# EAGLE board PowerSwitchingBoard (EAGLE 9.0.0), part 1 of 2
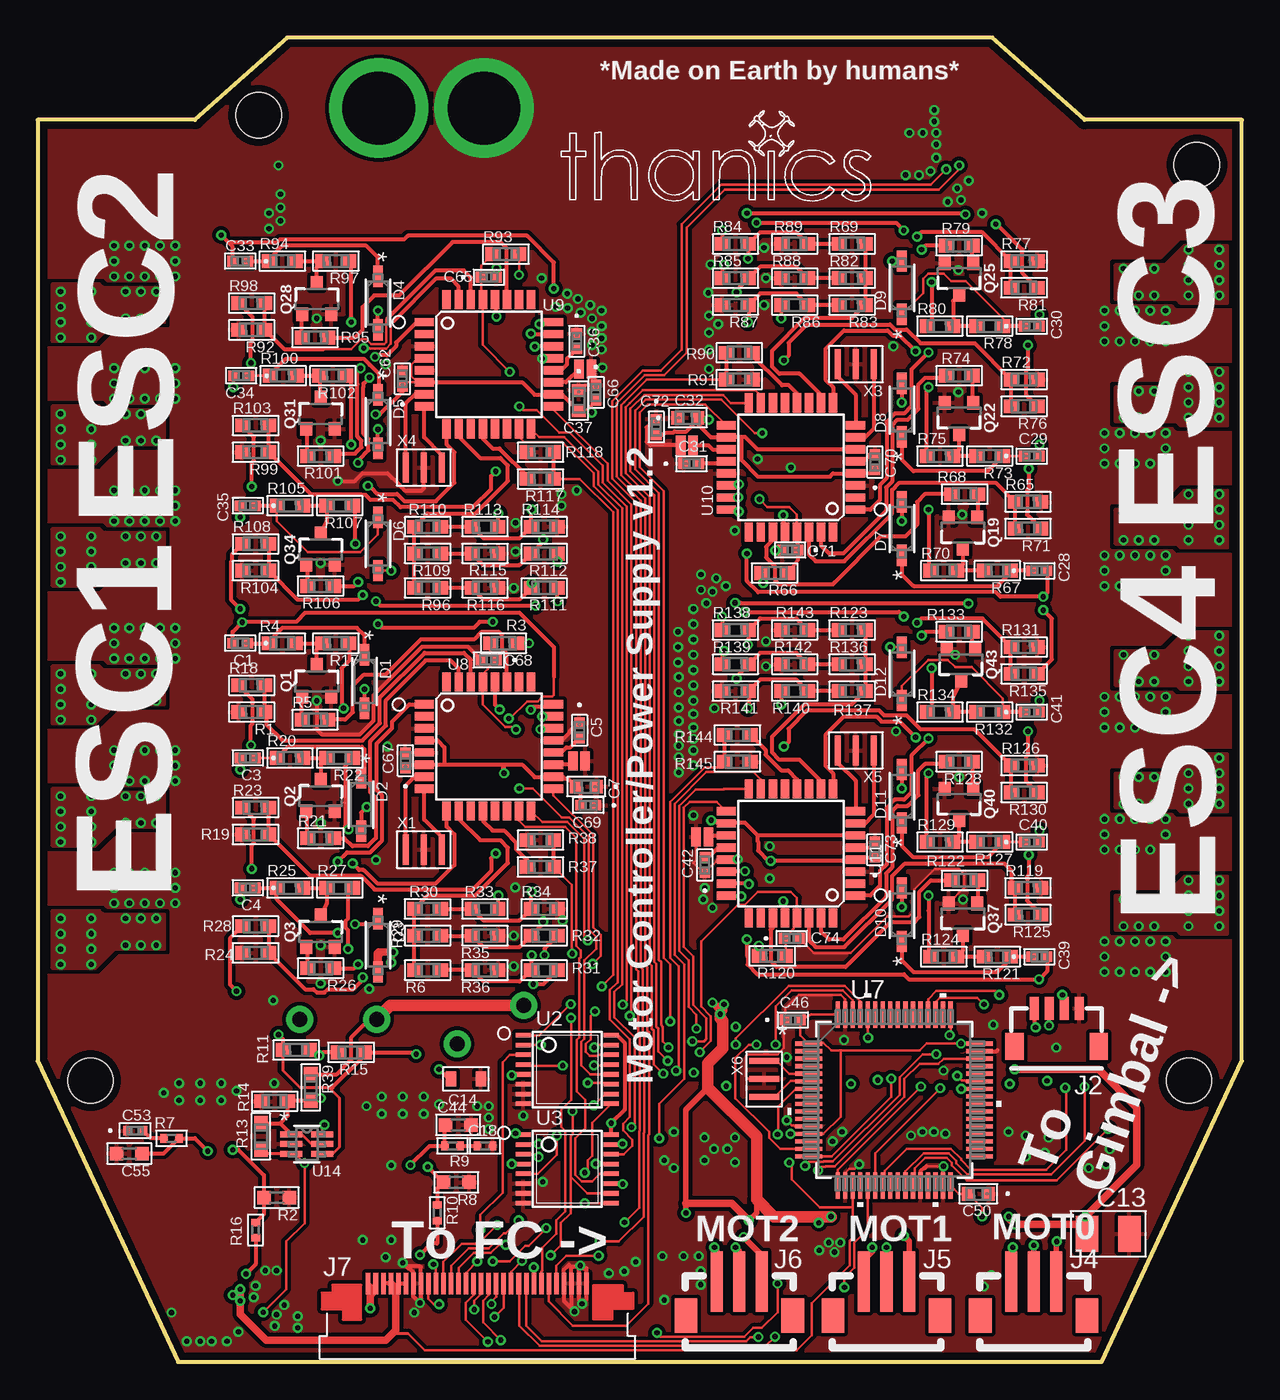
[diagram p0: board, top side]
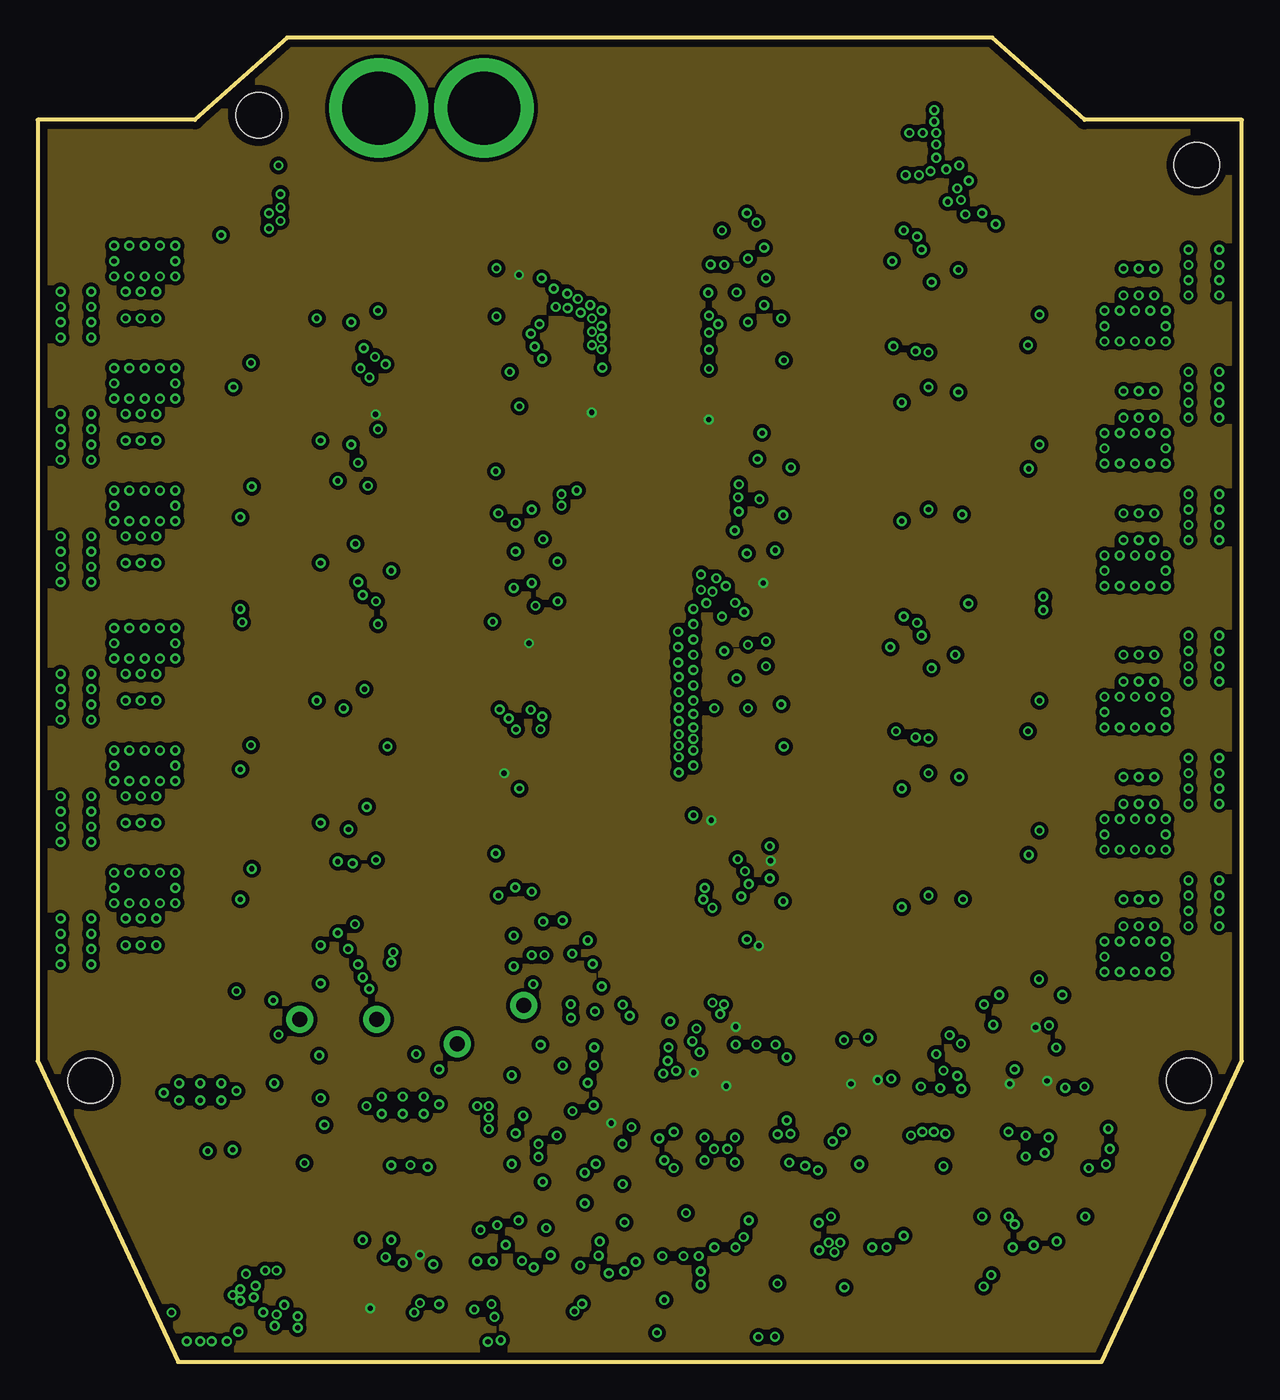
[diagram p1: board, inner layer Route2]
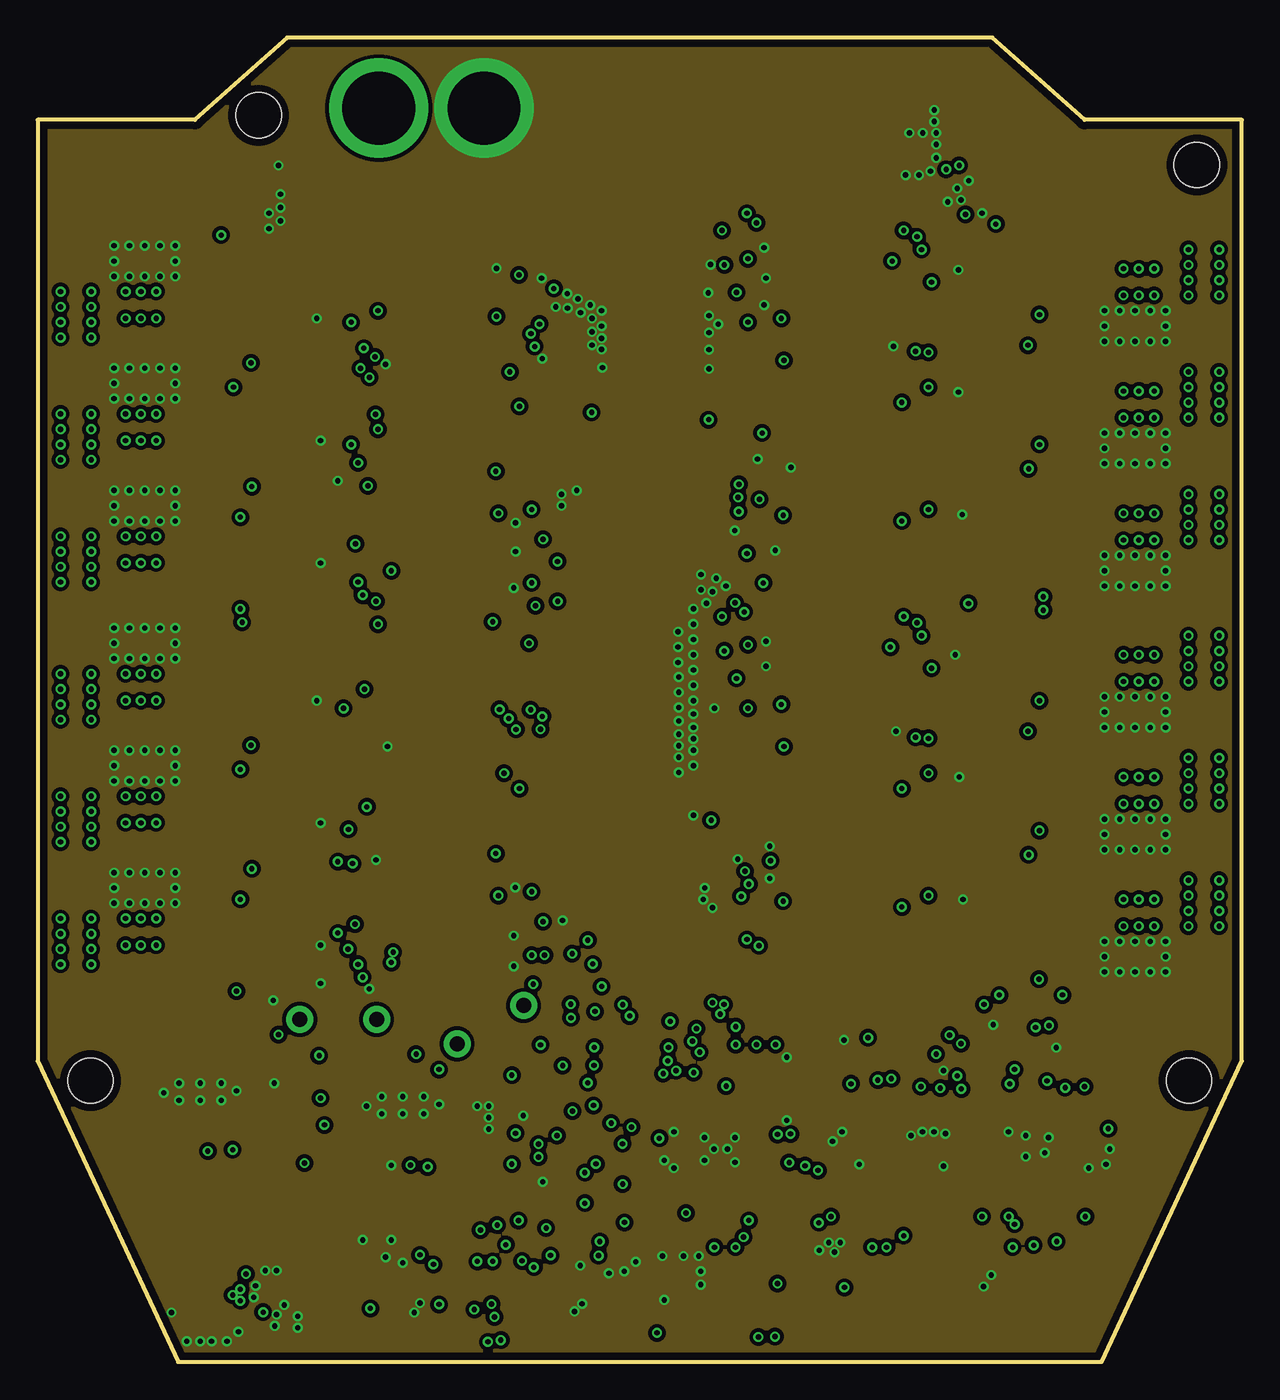
[diagram p2: board, inner layer Route15]
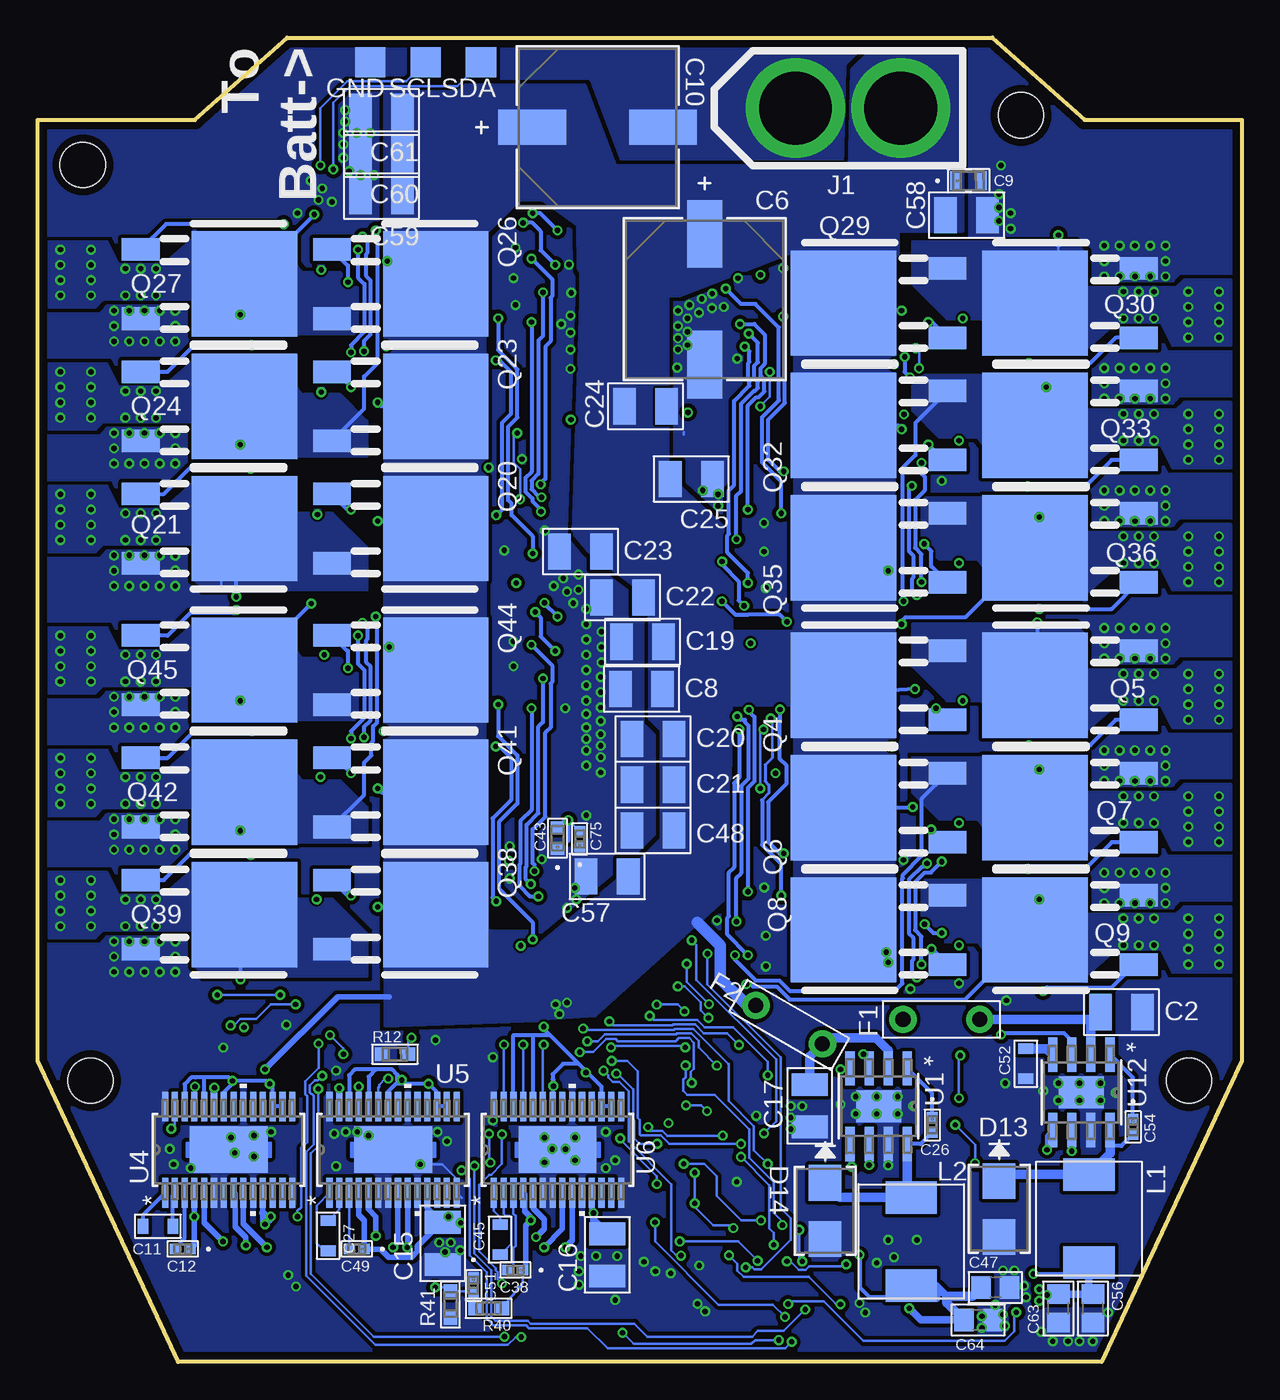
[diagram p3: board, bottom side, seen from below]

Size 80 x 88 mm. Coordinates in mm from the lower left corner, seen from the top.
Outline: 0,20 9.33,0 70.67,0 80,20 80,82.54 69.56,82.54 63.42,88 16.57,88 10.44,82.54 0,82.54 0,20
Copper layers (1*2*15*16): Top 0.035mm / dielectric 0.2mm / Route2 0.035mm / dielectric 1.2mm / Route15 0.035mm / dielectric 0.2mm / Bottom 0.035mm
Design rules "Elecrow_4-layer_PCB_eagle_rule": minimum track width 6mil, minimum drill 12mil, track to track 6mil, track to pad 6mil, pad to pad 6mil, via to via 8mil, smd to smd 0mil, copper to edge 20mil, drill to drill 10mil, minimum pad ring 6mil, minimum via ring 6mil, stop-mask expansion 0mil, vias tented up to drill 100mil, thermal gap 10mil
Holes 3 mm at 77,79.54 14.68,82.84 76.49,18.68 3.51,18.68

## Footprints (pad centres in the part's own frame; a part is rotated, then mirrored left to right if it is on the bottom)
0402-M = smd 0.711 x 0.711: 1 -0.508,0; 2 0.508,0
1210_CAPACITOR = smd 1.5 x 2.4: 1 -1.4,0; 2 1.4,0
PCAP_10X10-ELECT-M = smd 4.496 x 2.311: 1 -4.343,0; 2 4.343,0
G-188-M = smd 0.813 x 0.914: 1 -0.699,0; 2 0.699,0
G-21 = smd 0.711 x 1.245: 1 -0.851,0; 2 0.851,0
0603_CAPACITOR = smd 0.701 x 1.001: 1 -1.001,0; 2 1.001,0
C0402 = smd 0.5 x 0.6: 1 -0.5,0; 2 0.5,0
C0603 = smd 0.9 x 0.9: 1 -0.85,0; 2 0.85,0
C0805 = smd 1.3 x 1.5: 1 -0.95,0; 2 0.95,0
0402_CAPACITOR = smd 0.559 x 0.61: 1 -0.521,0; 2 0.521,0
SOD123-M = smd 1.416 x 0.652: A 1.776,0; C -1.776,0
DIODE_DO214AA_MBRS-M = smd 2.362 x 2.159: 1 -1.867,0; 2 1.867,0
0ZRB0400FF1A = drill 1 pad 1.8: 1 -2.55,0; 2 2.55,0
TP20SQ = smd 2 x 2: TP 0,0
XT60_CONNECTOR = drill 4.826 pad 6.604: + 3.5,0; - -3.5,0
JST_SH_4POS = smd 0.6 x 1.55: 1 -1.5,0; 2 -0.5,0; 3 0.5,0; 4 1.5,0 | smd 1.2 x 1.8: P$5 -2.8,2.525; P$6 2.8,2.525
B3B-ZR-SM4 = smd 0.8 x 4: 1 -1.5,0; 2 0,0; 3 1.5,0 | smd 1.5 x 2.3: P$4 3.55,2.25; P$5 -3.55,2.25
SFV30R-1STE1HLF = smd 0.3 x 1.4: 1 -7.25,0; 2 -6.75,0; 3 -6.25,0; 4 -5.75,0; 5 -5.25,0; 6 -4.75,0; 7 -4.25,0; 8 -3.75,0; 9 -3.25,0; 10 -2.75,0; 11 -2.25,0; 12 -1.75,0; 13 -1.25,0; 14 -0.75,0; 15 -0.25,0; 16 0.25,0; 17 0.75,0; 18 1.25,0; 19 1.75,0; 20 2.25,0; 21 2.75,0; 22 3.25,0; 23 3.75,0; 24 4.25,0; 25 4.75,0; 26 5.25,0; 27 5.75,0; 28 6.25,0; 29 6.75,0; 30 7.25,0
SMT-JUMPER_2_NO_NO-SILK = smd 0.635 x 1.27: 1 -0.406,0; 2 0.406,0
PA431.XXX = smd 2.15 x 3.4: P$1 -2.925,0; P$2 2.925,0
SOT23-3 = smd 0.8 x 0.9: 1 -0.95,-1; 2 0.95,-1; 3 0,1.1
DPAK = smd 1.5 x 2.5: 1 -2.3,0; 3 2.3,0 | smd 7 x 7: 2 0,6.9
RC0603N-M = smd 0.965 x 0.914: 1 -0.876,0; 2 0.876,0
R0603 = smd 0.9 x 0.9: 1 -0.85,0; 2 0.85,0
R0402 = smd 0.5 x 0.6: 1 -0.5,0; 2 0.5,0
D8-M = smd 2.286 x 0.61: 1 -2.515,1.905; 2 -2.515,0.635; 3 -2.515,-0.635; 4 -2.515,-1.905; 5 2.515,-1.905; 6 2.515,-0.635; 7 2.515,0.635; 8 2.515,1.905 | smd 2.13 x 3: EP 0,0
TSSOP16 = smd 0.305 x 0.991: 1 -2.275,-2.918; 2 -1.625,-2.918; 3 -0.975,-2.918; 4 -0.325,-2.918; 5 0.325,-2.918; 6 0.975,-2.918; 7 1.625,-2.918; 8 2.275,-2.918; 9 2.275,2.918; 10 1.625,2.918; 11 0.975,2.918; 12 0.325,2.918; 13 -0.325,2.918; 14 -0.975,2.918; 15 -1.625,2.918; 16 -2.275,2.918
PWP28_5P18X3P1-M = smd 1.981 x 0.406: 1 -2.87,4.225; 2 -2.87,3.575; 3 -2.87,2.925; 4 -2.87,2.275; 5 -2.87,1.625; 6 -2.87,0.975; 7 -2.87,0.325; 8 -2.87,-0.325; 9 -2.87,-0.975; 10 -2.87,-1.625; 11 -2.87,-2.275; 12 -2.87,-2.925; 13 -2.87,-3.575; 14 -2.87,-4.225; 15 2.87,-4.225; 16 2.87,-3.575; 17 2.87,-2.925; 18 2.87,-2.275; 19 2.87,-1.625; 20 2.87,-0.975; 21 2.87,-0.325; 22 2.87,0.325; 23 2.87,0.975; 24 2.87,1.625; 25 2.87,2.275; 26 2.87,2.925; 27 2.87,3.575; 28 2.87,4.225 | smd 3.1 x 5.18: 29 0,0
LQFP-64-M = smd 1.778 x 0.279: 1 -5.677,3.75; 2 -5.677,3.25; 3 -5.677,2.75; 4 -5.677,2.25; 5 -5.677,1.75; 6 -5.677,1.25; 7 -5.677,0.75; 8 -5.677,0.25; 9 -5.677,-0.25; 10 -5.677,-0.75; 11 -5.677,-1.25; 12 -5.677,-1.75; 13 -5.677,-2.25; 14 -5.677,-2.75; 15 -5.677,-3.25; 16 -5.677,-3.75; 33 5.677,-3.75; 34 5.677,-3.25; 35 5.677,-2.75; 36 5.677,-2.25; 37 5.677,-1.75; 38 5.677,-1.25; 39 5.677,-0.75; 40 5.677,-0.25; 41 5.677,0.25; 42 5.677,0.75; 43 5.677,1.25; 44 5.677,1.75; 45 5.677,2.25; 46 5.677,2.75; 47 5.677,3.25; 48 5.677,3.75 | smd 0.279 x 1.778: 17 -3.75,-5.677; 18 -3.25,-5.677; 19 -2.75,-5.677; 20 -2.25,-5.677; 21 -1.75,-5.677; 22 -1.25,-5.677; 23 -0.75,-5.677; 24 -0.25,-5.677; 25 0.25,-5.677; 26 0.75,-5.677; 27 1.25,-5.677; 28 1.75,-5.677; 29 2.25,-5.677; 30 2.75,-5.677; 31 3.25,-5.677; 32 3.75,-5.677; 49 3.75,5.677; 50 3.25,5.677; 51 2.75,5.677; 52 2.25,5.677; 53 1.75,5.677; 54 1.25,5.677; 55 0.75,5.677; 56 0.25,5.677; 57 -0.25,5.677; 58 -0.75,5.677; 59 -1.25,5.677; 60 -1.75,5.677; 61 -2.25,5.677; 62 -2.75,5.677; 63 -3.25,5.677; 64 -3.75,5.677
TQFP32-08 = smd 1.27 x 0.559: 1 -4.293,2.8; 2 -4.293,2; 3 -4.293,1.2; 4 -4.293,0.4; 5 -4.293,-0.4; 6 -4.293,-1.2; 7 -4.293,-2; 8 -4.293,-2.8; 17 4.293,-2.8; 18 4.293,-2; 19 4.293,-1.2; 20 4.293,-0.4; 21 4.293,0.4; 22 4.293,1.2; 23 4.293,2; 24 4.293,2.8 | smd 0.559 x 1.27: 9 -2.8,-4.293; 10 -2,-4.293; 11 -1.2,-4.293; 12 -0.4,-4.293; 13 0.4,-4.293; 14 1.2,-4.293; 15 2,-4.293; 16 2.8,-4.293; 25 2.8,4.293; 26 2,4.293; 27 1.2,4.293; 28 0.4,4.293; 29 -0.4,4.293; 30 -1.2,4.293; 31 -2,4.293; 32 -2.8,4.293
DCK6-M = smd 1.473 x 0.406: 1 -1.029,0.65; 2 -1.029,0; 3 -1.029,-0.65; 4 1.029,-0.65; 5 1.029,0; 6 1.029,0.65
3-SMD = smd 0.4 x 2: 1 1.2,0; 2 0,0; 3 -1.2,0

## Placement (x,y rotation side)
C1  0.1uF (50V)  [0402-M]  13.46,47.75 180 top
C2  22uF  [1210_CAPACITOR]  8,23.24 0 bottom
C3  0.1uF (50V)  [0402-M]  13.97,40.13 180 top
C4  0.1uF (50V)  [0402-M]  13.97,31.5 180 top
C5  0.1uF  [0402-M]  35.99,41.96 270 top
C6  470uF  [PCAP_10X10-ELECT-M]  35.69,70.61 270 bottom
C7  2.2uF  [G-188-M]  36.45,38.23 180 top
C8  22uF  [1210_CAPACITOR]  39.88,44.7 0 bottom
C9  10uF  [G-21]  18.16,78.49 0 bottom
C10  470uF  [PCAP_10X10-ELECT-M]  42.8,82.04 0 bottom
C11  10nF  [0603_CAPACITOR]  72.01,9.02 180 bottom
C12  0.1uF  [0402-M]  70.36,7.49 180 bottom
C13  22uF  [1210_CAPACITOR]  71.12,8.51 180 top
C14  10nF  [0603_CAPACITOR]  28.45,18.8 180 top
C15  22uF  [1210_CAPACITOR]  53.09,7.87 90 bottom
C16  22uF  [1210_CAPACITOR]  42.16,7.11 90 bottom
C17  22uF  [1210_CAPACITOR]  28.7,17.02 270 bottom
C18  1nF  [C0402]  29.72,14.35 0 top
C19  22uF  [1210_CAPACITOR]  39.83,47.85 0 bottom
C20  22uF  [1210_CAPACITOR]  39.12,41.4 0 bottom
C21  22uF  [1210_CAPACITOR]  39.12,38.35 0 bottom
C22  22uF  [1210_CAPACITOR]  41.15,50.8 0 bottom
C23  22uF  [1210_CAPACITOR]  43.94,53.85 0 bottom
C24  22uF  [1210_CAPACITOR]  39.62,63.5 180 bottom
C25  22uF  [1210_CAPACITOR]  36.58,58.67 180 bottom
C26  0.1uF  [0402-M]  20.57,15.75 270 bottom
C27  10nF  [0603_CAPACITOR]  60.71,8.38 270 bottom
C28  0.1uF (50V)  [0402-M]  66.55,52.58 0 top
C29  0.1uF (50V)  [0402-M]  66.04,60.2 0 top
C30  0.1uF (50V)  [0402-M]  66.04,68.83 0 top
C31  0.1uF  [0402-M]  43.43,59.69 0 top
C32  2.2uF  [G-188-M]  43.18,62.74 0 top
C33  0.1uF (50V)  [0402-M]  13.46,73.15 180 top
C34  0.1uF (50V)  [0402-M]  13.51,65.53 180 top
C35  0.1uF (50V)  [0402-M]  13.97,56.9 180 top
C36  0.1uF  [0402-M]  35.81,67.82 270 top
C37  2.2uF  [G-188-M]  35.94,63.88 270 top
C38  0.1uF  [0402-M]  48.26,6.1 180 bottom
C39  0.1uF (50V)  [0402-M]  66.55,26.92 0 top
C40  0.1uF (50V)  [0402-M]  66.04,34.54 0 top
C41  0.1uF (50V)  [0402-M]  66.04,43.18 0 top
C42  0.1uF  [0402-M]  44.32,33.02 90 top
C43  2.2uF  [G-188-M]  45.47,34.8 90 bottom
C44  43pF  [C0603]  27.94,15.75 0 top
C45  10nF  [0603_CAPACITOR]  49.28,8.13 90 bottom
C46  0.1uF  [0402-M]  50.16,22.73 0 top
C47  22uF  [C0805]  16.38,4.95 0 bottom
C48  22uF  [1210_CAPACITOR]  39.12,35.31 180 bottom
C49  0.1uF  [0402-M]  58.8,7.49 180 bottom
C50  2.2uF  [G-188-M]  62.48,11.18 180 top
C51  0.1uF  [0402-M]  51.05,5.08 270 bottom
C52  10nF  [0603_CAPACITOR]  14.35,19.81 90 bottom
C53  2.2nF  [0402_CAPACITOR]  6.48,15.37 0 top
C54  0.1uF  [0402-M]  7.24,15.62 270 bottom
C55  43pF  [C0603]  6.1,13.84 180 top
C56  22uF  [C0805]  9.91,3.56 270 bottom
C57  22uF  [1210_CAPACITOR]  42.16,32.26 180 bottom
C58  22uF  [1210_CAPACITOR]  18.29,76.2 0 bottom
C59  22uF  [1210_CAPACITOR]  57.15,77.47 180 bottom
C60  22uF  [1210_CAPACITOR]  57.15,80.26 180 bottom
C61  22uF  [1210_CAPACITOR]  57.15,83.06 180 bottom
C62  0.1uF  [0402-M]  24.23,65.33 90 top
C63  22uF  [C0805]  12.19,3.56 270 bottom
C64  22uF  [C0805]  17.53,2.79 0 bottom
C65  0.1uF  [0402-M]  29.97,72.09 0 top
C66  0.1uF  [0402-M]  37.08,64.41 270 top
C67  0.1uF  [0402-M]  24.43,39.95 90 top
C68  0.1uF  [0402-M]  29.97,46.63 180 top
C69  0.1uF  [0402-M]  36.58,36.98 180 top
C70  0.1uF  [0402-M]  55.63,59.79 90 top
C71  0.1uF  [0402-M]  49.99,53.95 180 top
C72  0.1uF  [0402-M]  41.1,62.13 270 top
C73  0.1uF  [0402-M]  55.63,34.04 90 top
C74  0.1uF  [0402-M]  50.09,28.14 0 top
C75  0.1uF  [0402-M]  43.99,34.75 90 bottom
D1  1N4148  [SOD123-M]  21.72,45.21 270 top
D2  1N4148  [SOD123-M]  21.49,37.03 270 top
D3  1N4148  [SOD123-M]  22.61,27.69 270 top
D4  1N4148  [SOD123-M]  22.61,70.36 270 top
D5  1N4148  [SOD123-M]  22.61,62.48 270 top
D6  1N4148  [SOD123-M]  22.61,54.36 270 top
D7  1N4148  [SOD123-M]  57.4,55.37 90 top
D8  1N4148  [SOD123-M]  57.4,63.25 90 top
D9  1N4148  [SOD123-M]  57.4,71.37 90 top
D10  1N4148  [SOD123-M]  57.4,29.72 90 top
D11  1N4148  [SOD123-M]  57.4,37.59 90 top
D12  1N4148  [SOD123-M]  57.4,45.72 90 top
D13  SSB44-E3/52T  [DIODE_DO214AA_MBRS-M]  16.13,10.16 270 bottom
D14  SSB44-E3/52T  [DIODE_DO214AA_MBRS-M]  27.69,10.03 270 bottom
F1  0ZRB0400FF1A  [0ZRB0400FF1A]  19.96,22.76 0 bottom
F2  0ZRB0400FF1A  [0ZRB0400FF1A]  30.07,22.4 330 bottom
GND  TPTP20SQ  [TP20SQ]  57.91,86.36 180 bottom
J1  ESC_CONTACTS  [XT60_CONNECTOR]  26.16,83.31 0 bottom
J2  [JST_SH_4POS]  67.69,23.5 180 top
J4  B3B-ZR-SM4  [B3B-ZR-SM4]  66.17,5.33 180 top
J5  B3B-ZR-SM4  [B3B-ZR-SM4]  56.39,5.33 180 top
J6  B3B-ZR-SM4  [B3B-ZR-SM4]  46.61,5.33 180 top
J7  SFV30R-1STE1HLF  [SFV30R-1STE1HLF]  29.21,5.21 0 top
JP1  JUMPER-SMT_2_NO_NO-SILK  [SMT-JUMPER_2_NO_NO-SILK]  35.97,39.93 0 top
JP3  JUMPER-SMT_2_NO_NO-SILK  [SMT-JUMPER_2_NO_NO-SILK]  43.13,60.91 180 top
JP4  JUMPER-SMT_2_NO_NO-SILK  [SMT-JUMPER_2_NO_NO-SILK]  36.37,65.96 0 top
JP5  JUMPER-SMT_2_NO_NO-SILK  [SMT-JUMPER_2_NO_NO-SILK]  44.15,34.87 180 top
L1  10uH  [PA431.XXX]  10.16,9.53 270 bottom
L2  10uH  [PA431.XXX]  21.97,8 270 bottom
Q1  500mA/300V  [SOT23-3]  18.54,45.21 0 top
Q2  500mA/300V  [SOT23-3]  18.8,37.59 0 top
Q3  500mA/300V  [SOT23-3]  18.8,28.57 0 top
Q4  IRLR8726  [DPAK]  19.56,44.96 90 bottom
Q5  IRLR8726  [DPAK]  6.86,44.96 90 bottom
Q6  IRLR8726  [DPAK]  19.56,36.83 90 bottom
Q7  IRLR8726  [DPAK]  6.86,36.83 90 bottom
Q8  IRLR8726  [DPAK]  19.56,28.7 90 bottom
Q9  IRLR8726  [DPAK]  6.86,28.7 90 bottom
Q19  500mA/300V  [SOT23-3]  61.47,55.12 180 top
Q20  IRLR8726  [DPAK]  60.45,55.37 270 bottom
Q21  IRLR8726  [DPAK]  73.15,55.37 270 bottom
Q22  500mA/300V  [SOT23-3]  61.21,62.74 180 top
Q23  IRLR8726  [DPAK]  60.45,63.5 270 bottom
Q24  IRLR8726  [DPAK]  73.15,63.5 270 bottom
Q25  500mA/300V  [SOT23-3]  61.21,72.01 180 top
Q26  IRLR8726  [DPAK]  60.45,71.63 270 bottom
Q27  IRLR8726  [DPAK]  73.15,71.63 270 bottom
Q28  500mA/300V  [SOT23-3]  18.54,70.61 0 top
Q29  IRLR8726  [DPAK]  19.56,70.36 90 bottom
Q30  IRLR8726  [DPAK]  6.86,70.36 90 bottom
Q31  500mA/300V  [SOT23-3]  18.8,62.99 0 top
Q32  IRLR8726  [DPAK]  19.56,62.23 90 bottom
Q33  IRLR8726  [DPAK]  6.86,62.23 90 bottom
Q34  500mA/300V  [SOT23-3]  18.8,53.98 0 top
Q35  IRLR8726  [DPAK]  19.56,54.1 90 bottom
Q36  IRLR8726  [DPAK]  6.86,54.1 90 bottom
Q37  500mA/300V  [SOT23-3]  61.47,29.46 180 top
Q38  IRLR8726  [DPAK]  60.45,29.72 270 bottom
Q39  IRLR8726  [DPAK]  73.15,29.72 270 bottom
Q40  500mA/300V  [SOT23-3]  61.21,37.08 180 top
Q41  IRLR8726  [DPAK]  60.45,37.85 270 bottom
Q42  IRLR8726  [DPAK]  73.15,37.85 270 bottom
Q43  500mA/300V  [SOT23-3]  61.34,46.35 180 top
Q44  IRLR8726  [DPAK]  60.45,45.97 270 bottom
Q45  IRLR8726  [DPAK]  73.15,45.97 270 bottom
R1  10k  [RC0603N-M]  14.22,43.18 180 top
R2  3.24k  [R0603]  15.88,10.92 180 top
R3  10k  [RC0603N-M]  30.95,47.75 0 top
R4  2.2k  [RC0603N-M]  16.26,47.75 0 top
R5  4.7k  [RC0603N-M]  18.43,42.67 0 top
R6  47k  [RC0603N-M]  25.91,26.04 180 top
R7  28.7k  [R0402]  8.89,14.86 0 top
R8  1.96k  [R0603]  27.81,11.94 180 top
R9  39.2k  [R0402]  27.56,14.35 180 top
R10  10.2k  [R0402]  26.54,9.91 270 top
R11  100k  [RC0603N-M]  17.17,20.73 180 top
R12  10k  [RC0603N-M]  56.26,20.45 0 bottom
R13  100k  [RC0603N-M]  14.83,14.99 270 top
R14  1k  [RC0603N-M]  15.75,17.32 180 top
R15  100k  [RC0603N-M]  20.83,20.57 180 top
R16  10.2k  [R0402]  14.48,8.76 270 top
R17  100R  [RC0603N-M]  19.81,47.75 180 top
R18  100R  [RC0603N-M]  14.22,44.96 0 top
R19  10k  [RC0603N-M]  14.48,35.05 180 top
R20  2.2k  [RC0603N-M]  16.76,40.13 0 top
R21  4.7k  [RC0603N-M]  18.8,34.8 0 top
R22  100R  [RC0603N-M]  20.07,40.13 180 top
R23  100R  [RC0603N-M]  14.48,36.83 0 top
R24  10k  [RC0603N-M]  14.48,27.18 180 top
R25  2.2k  [RC0603N-M]  16.76,31.5 0 top
R26  4.7k  [RC0603N-M]  18.8,26.16 0 top
R27  100R  [RC0603N-M]  20.07,31.5 180 top
R28  100R  [RC0603N-M]  14.48,28.96 0 top
R29  47k  [RC0603N-M]  25.91,28.32 180 top
R30  47k  [RC0603N-M]  25.91,30.1 180 top
R31  47k  [RC0603N-M]  33.66,26.04 180 top
R32  47k  [RC0603N-M]  33.66,28.32 180 top
R33  47k  [RC0603N-M]  29.72,30.1 180 top
R34  4.7k  [RC0603N-M]  33.66,30.1 0 top
R35  4.7k  [RC0603N-M]  29.72,28.32 0 top
R36  4.7k  [RC0603N-M]  29.72,26.04 0 top
R37  10k  [RC0603N-M]  33.4,32.89 180 top
R38  10k  [RC0603N-M]  33.4,34.67 180 top
R39  2.2k  [RC0603N-M]  18.14,18.24 270 top
R40  10k  [RC0603N-M]  50.04,3.56 180 bottom
R41  1.5k  [RC0603N-M]  52.58,3.81 270 bottom
R65  10k  [RC0603N-M]  65.79,57.15 0 top
R66  10k  [RC0603N-M]  48.96,52.43 180 top
R67  2.2k  [RC0603N-M]  63.75,52.58 180 top
R68  4.7k  [RC0603N-M]  61.58,57.66 180 top
R69  47k  [RC0603N-M]  54.1,74.3 0 top
R70  100R  [RC0603N-M]  60.2,52.58 0 top
R71  100R  [RC0603N-M]  65.79,55.37 180 top
R72  10k  [RC0603N-M]  65.53,65.28 0 top
R73  2.2k  [RC0603N-M]  63.25,60.2 180 top
R74  4.7k  [RC0603N-M]  61.21,65.53 180 top
R75  100R  [RC0603N-M]  59.94,60.2 0 top
R76  100R  [RC0603N-M]  65.53,63.5 180 top
R77  10k  [RC0603N-M]  65.53,73.15 0 top
R78  2.2k  [RC0603N-M]  63.25,68.83 180 top
R79  4.7k  [RC0603N-M]  61.21,74.17 180 top
R80  100R  [RC0603N-M]  59.94,68.83 0 top
R81  100R  [RC0603N-M]  65.53,71.37 180 top
R82  47k  [RC0603N-M]  54.1,72.01 0 top
R83  47k  [RC0603N-M]  54.1,70.23 0 top
R84  47k  [RC0603N-M]  46.35,74.3 0 top
R85  47k  [RC0603N-M]  46.35,72.01 0 top
R86  47k  [RC0603N-M]  50.29,70.23 0 top
R87  4.7k  [RC0603N-M]  46.35,70.23 180 top
R88  4.7k  [RC0603N-M]  50.29,72.01 180 top
R89  4.7k  [RC0603N-M]  50.29,74.3 180 top
R90  10k  [RC0603N-M]  46.61,67.06 0 top
R91  10k  [RC0603N-M]  46.61,65.28 0 top
R92  10k  [RC0603N-M]  14.22,68.58 180 top
R93  10k  [RC0603N-M]  31.1,73.61 0 top
R94  2.2k  [RC0603N-M]  16.26,73.15 0 top
R95  4.7k  [RC0603N-M]  18.43,68.07 0 top
R96  47k  [RC0603N-M]  25.91,51.44 180 top
R97  100R  [RC0603N-M]  19.81,73.15 180 top
R98  100R  [RC0603N-M]  14.22,70.36 0 top
R99  10k  [RC0603N-M]  14.48,60.45 180 top
R100  2.2k  [RC0603N-M]  16.31,65.53 0 top
R101  4.7k  [RC0603N-M]  18.8,60.2 0 top
R102  100R  [RC0603N-M]  19.61,65.53 180 top
R103  100R  [RC0603N-M]  14.48,62.23 0 top
R104  10k  [RC0603N-M]  14.48,52.58 180 top
R105  2.2k  [RC0603N-M]  16.76,56.9 0 top
R106  4.7k  [RC0603N-M]  18.8,51.56 0 top
R107  100R  [RC0603N-M]  20.07,56.9 180 top
R108  100R  [RC0603N-M]  14.48,54.36 0 top
R109  47k  [RC0603N-M]  25.91,53.72 180 top
R110  47k  [RC0603N-M]  25.91,55.5 180 top
R111  47k  [RC0603N-M]  33.66,51.44 180 top
R112  47k  [RC0603N-M]  33.66,53.72 180 top
R113  47k  [RC0603N-M]  29.72,55.5 180 top
R114  4.7k  [RC0603N-M]  33.66,55.5 0 top
R115  4.7k  [RC0603N-M]  29.72,53.72 0 top
R116  4.7k  [RC0603N-M]  29.72,51.44 0 top
R117  10k  [RC0603N-M]  33.4,58.67 180 top
R118  10k  [RC0603N-M]  33.4,60.45 180 top
R119  10k  [RC0603N-M]  65.79,31.5 0 top
R120  10k  [RC0603N-M]  48.81,26.97 180 top
R121  2.2k  [RC0603N-M]  63.75,26.92 180 top
R122  4.7k  [RC0603N-M]  61.58,32 180 top
R123  47k  [RC0603N-M]  54.1,48.64 0 top
R124  100R  [RC0603N-M]  60.2,26.92 0 top
R125  100R  [RC0603N-M]  65.79,29.72 180 top
R126  10k  [RC0603N-M]  65.53,39.62 0 top
R127  2.2k  [RC0603N-M]  63.25,34.54 180 top
R128  4.7k  [RC0603N-M]  61.21,39.88 180 top
R129  100R  [RC0603N-M]  59.94,34.54 0 top
R130  100R  [RC0603N-M]  65.53,37.85 180 top
R131  10k  [RC0603N-M]  65.53,47.5 0 top
R132  2.2k  [RC0603N-M]  63.25,43.18 180 top
R133  4.7k  [RC0603N-M]  61.21,48.51 180 top
R134  100R  [RC0603N-M]  59.94,43.18 0 top
R135  100R  [RC0603N-M]  65.53,45.72 180 top
R136  47k  [RC0603N-M]  54.1,46.35 0 top
R137  47k  [RC0603N-M]  54.1,44.58 0 top
R138  47k  [RC0603N-M]  46.35,48.64 0 top
R139  47k  [RC0603N-M]  46.35,46.35 0 top
R140  47k  [RC0603N-M]  50.29,44.58 0 top
R141  4.7k  [RC0603N-M]  46.35,44.58 180 top
R142  4.7k  [RC0603N-M]  50.29,46.35 180 top
R143  4.7k  [RC0603N-M]  50.29,48.64 180 top
R144  10k  [RC0603N-M]  46.48,41.66 0 top
R145  10k  [RC0603N-M]  46.48,39.88 0 top
SCL  TPTP20SQ  [TP20SQ]  54.23,86.36 180 bottom
SDA  TPTP20SQ  [TP20SQ]  50.55,86.36 180 bottom
U1  TPS54331DRD8-M  [D8-M]  24.13,16.99 270 bottom
U2  74HC4052PW  [TSSOP16]  35.18,19.43 270 top
U3  74HC4052PW  [TSSOP16]  35.18,12.83 270 top
U4  DRV8313  [PWP28_5P18X3P1-M]  67.31,14.1 90 bottom
U5  DRV8313  [PWP28_5P18X3P1-M]  56.39,14.1 90 bottom
U6  DRV8313  [PWP28_5P18X3P1-M]  45.47,14.1 90 bottom
U7  STM32F103RCT6LQFP-64-M  [LQFP-64-M]  56.9,17.4 0 top
U8  MEGA8-AI  [TQFP32-08]  29.97,40.89 0 top
U9  MEGA8-AI  [TQFP32-08]  29.97,66.29 0 top
U10  MEGA8-AI  [TQFP32-08]  50.04,59.44 180 top
U11  MEGA8-AI  [TQFP32-08]  50.04,33.78 180 top
U12  TPS54331DRD8-M  [D8-M]  10.67,17.91 270 bottom
U14  SN74LVC1G373DCKRDCK6-M  [DCK6-M]  17.88,14.48 0 top
X1  16MHz  [3-SMD]  25.65,34.04 0 top
X3  16MHz  [3-SMD]  54.36,66.29 180 top
X4  16MHz  [3-SMD]  25.65,59.44 0 top
X5  16MHz  [3-SMD]  54.36,40.64 180 top
X6  8MHz  [3-SMD]  48.26,18.8 270 top

## Library data of the parts
C1 C3-C5 C12 C26 C28-C31 C33-C36 C38-C42 C46 C49 C51 C54 C62 C65-C75 = 0.1uF-capacitor-0402; MANUFACTURER_PART_NUMBER: 0402ZD104KAT2A; VENDOR: AVX Corporation
C2 C8 C11 C13-C17 C19-C25 C27 C45 C48 C52 C53 C57-C61 J1 J2 L1 L2 Q4-Q9 Q20 Q21 Q23 Q24 Q26 Q27 Q29 Q30 Q32 Q33 Q35 Q36 Q38 Q39 Q41 Q42 Q44 Q45 U2 U3 X1 X3-X6 = thanics_robotics
C6 C10 = 470uF-capacitor; MANUFACTURER_PART_NUMBER: UWT1E471MNL1GS; VENDOR: Nichicon
C7 C32 C37 C43 C50 = 2.2uF X5R Capacitor; COPYRIGHT: Copyright C 2015 Accelerated Designs. All rights reserved; MANUFACTURER_PART_NUMBER: GRM188R61C225KE15J; VENDOR: Vendor
C9 = 10uF X5R Ceramic Capacitor; COPYRIGHT: Copyright C 2015 Accelerated Designs. All rights reserved; MANUFACTURER_PART_NUMBER: GRM21BR60J106ME19L; VENDOR: Vendor
C18 = thanics-capacitor; RATING: 6.3V
C44 C55 = thanics-capacitor; RATING: 50V
C47 C56 C63 C64 = thanics-capacitor; RATING: 16V
D1-D12 = 1n4148w-diode; COPYRIGHT: Copyright C 2015 Accelerated Designs. All rights reserved; MANUFACTURER_PART_NUMBER: 1N4148W7F; VENDOR: Diodes Inc
D13 D14 = ssb44-schottky; MANUFACTURER_PART_NUMBER: SSB44E352T; VENDOR: Vishay
F1 F2 = ptc-fuse
GND SCL SDA = testpad
J4-J6 = jst
J7 = thanics-connector
JP1 JP3-JP5 = SparkFun-Jumpers
Q1-Q3 Q19 Q22 Q25 Q28 Q31 Q34 Q37 Q40 Q43 = SparkFun-DiscreteSemi; PROD_ID: TRANS-09116
R1 R3 R12 R19 R24 R37 R38 R40 R65 R66 R72 R77 R90-R93 R99 R104 R117-R120 R126 R131 R144 R145 = 10k-resistor(0603); MANUFACTURER_PART_NUMBER: RC0603JR0710KL; VENDOR: Yageo
R2 R7-R10 R16 = thanics-resistor
R4 R20 R25 R39 R67 R73 R78 R94 R100 R105 R121 R127 R132 = 2.2k-resistor; MANUFACTURER_PART_NUMBER: RC0603JR072K2L; VENDOR: Yageo
R5 R21 R26 R34-R36 R68 R74 R79 R87-R89 R95 R101 R106 R114-R116 R122 R128 R133 R141-R143 = 4.7k-resistor; MANUFACTURER_PART_NUMBER: RC0603JR074K7L; VENDOR: Yageo
R6 R29-R33 R69 R82-R86 R96 R109-R113 R123 R136-R140 = 47k-resistor; MANUFACTURER_PART_NUMBER: RC0603JR0747KL; VENDOR: Yageo
R11 R13 R15 = 100k-resistor; MANUFACTURER_PART_NUMBER: RC0603JR07100KL; VENDOR: Yageo
R14 = 1k-resistor; CASE: 0603 1608 metric; COMPOSITION: Thick Film; COPYRIGHT: Copyright C 2015 Accelerated Designs. All rights reserved; DATASHEET: httpwww.yageo.comdocumentsrecentPYuRC0603_51_RoHS_L_4.pdf; DESCRIPTION: RES 1.0K OHM 110W 5% 0603 SMD; DIGIKEYPARTNUMBER: 3111.0KGRTRND; HEIGHT: 0.022" 0.55mm; LEADSTYLE: Surface Mount SMD SMT; MANUFACTURER_PART_NUMBER: RC0603JR071KL; NEWARKPARTNUMBER: 14M7231; NUMBEROFTERMINATIONS: 2; PACKAGECASE: 0603 1608 Metric; PACKAGING: Tape &amp Reel TR; POWERWATTS: 0.1W 110W; QUANTITY_AVAILABLE: 0; RESISTANCEINOHMS: 1.00K; RESISTANCEOHMS: 1K; SIZEDIMENSION: 0.063" L x 0.031" W 1.60mm x 0.80mm; TEMPERATURECOEFFICIENT: 100ppm°C; TOLERANCE: 5%; VENDOR: Yageo; VOLTAGEWORKING: 50V
R17 R18 R22 R23 R27 R28 R70 R71 R75 R76 R80 R81 R97 R98 R102 R103 R107 R108 R124 R125 R129 R130 R134 R135 = 100-resistor; MANUFACTURER_PART_NUMBER: RC0603JR07100RL; VENDOR: Yageo
R41 = 1.5k-resistor; MANUFACTURER_PART_NUMBER: RC0603JR071K5L; VENDOR: Yageo
U1 U12 = tps54331; MANUFACTURER_PART_NUMBER: TPS54331DR; VENDOR: Texas Instruments
U4-U6 = DRV8313_BLDC_Driver; MANUFACTURER_PART_NUMBER: drv8313pwp; VENDOR: TEXAS INSTRUMENTS
U7 = stm32f103; MANUFACTURER_PART_NUMBER: STM32F103RCT6; VENDOR: STMicroelectronics
U8-U11 = atmel; MPN: ATMEGA8-16AU; OC_FARNELL: 9171371; OC_NEWARK: 73M8863
U14 = d-latch; MANUFACTURER_PART_NUMBER: SN74LVC1G373DCKR; VENDOR: Texas Instruments

## Nets
+3V3: C46.2 C50.2 C56.1 C63.1 J7.3 J7.4 J7.5 J7.6 L1.P$2 R16.2 U7.1 U7.13 U7.19 U7.32 U7.48 U7.64
+5V: C7.2 C32.2 C37.2 C43.2 C47.1 C62.1 C64.1 C66.2 C67.1 C69.2 C70.1 C72.2 C73.1 C75.2 J2.4 J7.1 J7.2 L2.P$2 R3.2 R10.2 R66.2 R93.2 R120.2 U2.16 U3.16 U4.16 U4.17 U4.22 U4.24 U4.26 U5.16 U5.17 U5.22 U5.24 U5.26 U6.16 U6.17 U6.22 U6.24 U6.26 U8.4 U8.6 U8.18 U9.4 U9.6 U9.18 U10.4 U10.6 U10.18 U11.4 U11.6 U11.18
A0: U4.27 U7.27
A1: U5.27 U7.22
A2: U6.27 U7.62
A_SENSE: R30.1 R33.2 R34.1 U8.24
A_SENSE2: R110.1 R113.2 R114.1 U9.24
A_SENSE3: R83.1 R86.2 R87.1 U10.24
A_SENSE4: R137.1 R140.2 R141.1 U11.24
AHIN: R5.2 U8.27
AHIN2: R95.2 U9.27
AHIN3: R68.2 U10.27
AHIN4: R122.2 U11.27
ALIN: R1.1 R18.2 U8.30
ALIN2: R92.1 R98.2 U9.30
ALIN3: R65.1 R71.2 U10.30
ALIN4: R119.1 R125.2 U11.30
AOUT: C1.2 Q4.3 Q5.2 R33.1
AOUT2: C33.2 Q29.3 Q30.2 R113.1
AOUT3: C28.2 Q20.3 Q21.2 R86.1
AOUT4: C39.2 Q38.3 Q39.2 R140.1
B0: U4.25 U7.26
B1: U5.25 U7.17
B2: U6.25 U7.15
B_SENSE: R29.1 R32.2 R35.1 U8.23
B_SENSE2: R109.1 R112.2 R115.1 U9.23
B_SENSE3: R82.1 R85.2 R88.1 U10.23
B_SENSE4: R136.1 R139.2 R142.1 U11.23
BATT_SCL: J7.20 SCL.TP
BATT_SDA: J7.19 SDA.TP
BHIN: R21.2 U8.31
BHIN2: R101.2 U9.31
BHIN3: R74.2 U10.31
BHIN4: R128.2 U11.31
BLIN: R19.1 R23.2 U8.28
BLIN2: R99.1 R103.2 U9.28
BLIN3: R72.1 R76.2 U10.28
BLIN4: R126.1 R130.2 U11.28
BOOT0: R12.2 U7.60
BOUT: C3.2 Q6.3 Q7.2 R32.1
BOUT2: C34.2 Q32.3 Q33.2 R112.1
BOUT3: C29.2 Q23.3 Q24.2 R85.1
BOUT4: C40.2 Q41.3 Q42.2 R139.1
C0: U4.23 U7.23
C1: U5.23 U7.16
C2: U6.23 U7.61
C_SENSE: R6.1 R31.2 R36.1 U8.22
C_SENSE2: R96.1 R111.2 R116.1 U9.22
C_SENSE3: R69.1 R84.2 R89.1 U10.22
C_SENSE4: R123.1 R138.2 R143.1 U11.22
CHIN: R26.2 U8.1
CHIN2: R106.2 U9.1
CHIN3: R79.2 U10.1
CHIN4: R133.2 U11.1
CLIN: R24.1 R28.2 U8.9
CLIN2: R104.1 R108.2 U9.9
CLIN3: R77.1 R81.2 U10.9
CLIN4: R131.1 R135.2 U11.9
COUT: C4.2 Q8.3 Q9.2 R31.1
COUT2: C35.2 Q35.3 Q36.2 R111.1
COUT3: C30.2 Q26.3 Q27.2 R84.1
COUT4: C41.2 Q44.3 Q45.2 R138.1
EN: R11.2 R15.1 U1.3 U12.3 U14.4
FAULT1: U4.18
FAULT2: U5.18
FAULT3: U6.18
GND: C2.2 C5.1 C6.2 C7.1 C8.1 C9.2 C10.2 C13.1 C14.1 C15.1 C16.1 C17.2 C18.2 C19.1 C20.1 C21.1 C22.1 C23.1 C24.1 C25.1 C31.1 C32.1 C36.1 C37.1 C42.1 C43.1 C44.2 C46.1 C47.2 C48.2 C50.1 C51.1 C52.1 C53.1 C55.2 C56.2 C57.2 C58.2 C59.2 C60.2 C61.2 C62.2 C63.2 C64.2 C65.2 C66.1 C67.2 C68.2 C69.1 C70.2 C71.2 C72.1 C73.2 C74.2 C75.1 D13.2 D14.2 GND.TP J1.- J2.1 J7.7 J7.8 J7.27 J7.28 J7.29 J7.30 JP1.2 JP3.2 JP4.2 JP5.2 Q1.2 Q2.2 Q3.2 Q5.3 Q7.3 Q9.3 Q19.2 Q21.3 Q22.2 Q24.3 Q25.2 Q27.3 Q28.2 Q30.3 Q31.2 Q33.3 Q34.2 Q36.3 Q37.2 Q39.3 Q40.2 Q42.3 Q43.2 Q45.3 R1.2 R2.1 R8.1 R12.1 R14.2 R19.2 R24.2 R34.2 R35.2 R36.2 R38.2 R41.2 R65.2 R72.2 R77.2 R87.2 R88.2 R89.2 R91.2 R92.2 R99.2 R104.2 R114.2 R115.2 R116.2 R118.2 R119.2 R126.2 R131.2 R141.2 R142.2 R143.2 R145.2 U1.7 U1.EP U2.6 U2.7 U2.8 U3.6 U3.7 U3.8 U4.6 U4.7 U4.10 U4.14 U4.20 U4.28 U4.29 U5.6 U5.7 U5.10 U5.14 U5.20 U5.28 U5.29 U6.6 U6.7 U6.10 U6.14 U6.20 U6.28 U6.29 U7.12 U7.18 U7.28 U7.31 U7.47 U7.63 U8.3 U8.5 U8.21 U9.3 U9.5 U9.21 U10.3 U10.5 U10.21 U11.3 U11.5 U11.21 U12.7 U12.EP U14.2 X1.2 X3.2 X4.2 X5.2 X6.2
LIPO: C51.2 R40.2 R41.1 U7.21
MISO: J7.13 U3.3
MISO1: U3.1 U8.16
MISO2: U3.5 U9.16
MISO3: U3.2 U10.16
MISO4: U3.4 U11.16
MOSI: J7.12 U3.13
MOSI1: U3.12 U8.15
MOSI2: U3.14 U9.15
MOSI3: U3.15 U10.15
MOSI4: U3.11 U11.15
MOT0_1: J4.1 U4.5
MOT0_2: J4.2 U4.8
MOT0_3: J4.3 U4.9
MOT1_1: J5.1 U5.5
MOT1_2: J5.2 U5.8
MOT1_3: J5.3 U5.9
MOT2_1: J6.1 U6.5
MOT2_2: J6.2 U6.8
MOT2_3: J6.3 U6.9
N$1: C11.1 U4.2
N$2: C55.1 R7.2 U12.6
N$3: C53.2 R7.1
N$4: Q1.1 R5.1
N$5: Q4.1 R17.1
N$6: Q1.3 R4.2 R17.2
N$7: Q2.1 R21.1
N$8: C1.1 D1.C R4.1
N$9: Q5.1 R18.1
N$10: Q6.1 R22.1
N$11: C52.2 U12.4
N$12: C54.1 U12.1
N$13: C44.1 R9.2 U1.6
N$14: C18.1 R9.1
N$15: C14.2 U1.4
N$16: C26.1 U1.1
N$17: C26.2 D14.1 L2.P$1 U1.8
N$18: C54.2 D13.1 L1.P$1 U12.8
N$19: R8.2 R10.1 U1.5
N$20: R2.2 R16.1 U12.5
N$21: Q2.3 R20.2 R22.2
N$22: C3.1 D2.C R20.1
N$24: Q7.1 R23.1
N$25: Q3.1 R26.1
N$30: Q8.1 R27.1
N$31: Q3.3 R25.2 R27.2
N$32: C4.1 D3.C R25.1
N$33: Q9.1 R28.1
N$34: C5.2 U8.20
N$35: U8.7 X1.3
N$36: U8.8 X1.1
N$37: C11.2 U4.1
N$38: JP1.1 U8.19
N$39: C27.1 U5.2
N$40: C27.2 U5.1
N$41: C49.2 U5.3
N$42: C45.1 U6.2
N$43: C45.2 U6.1
N$44: R37.2 U8.12
N$45: C38.2 U6.3
N$46: U7.5 X6.3
N$47: C12.2 U4.3
N$48: U7.6 X6.1
N$61: Q19.1 R68.1
N$62: Q20.1 R70.1
N$63: Q19.3 R67.2 R70.2
N$64: C28.1 D7.C R67.1
N$65: Q21.1 R71.1
N$66: Q22.1 R74.1
N$67: Q23.1 R75.1
N$68: Q22.3 R73.2 R75.2
N$69: C29.1 D8.C R73.1
N$70: Q24.1 R76.1
N$71: Q25.1 R79.1
N$72: Q26.1 R80.1
N$73: Q25.3 R78.2 R80.2
N$74: C30.1 D9.C R78.1
N$75: Q27.1 R81.1
N$76: R90.2 U10.12
N$77: JP3.1 U10.19
N$78: C31.2 U10.20
N$79: U10.7 X3.3
N$80: U10.8 X3.1
N$82: Q28.1 R95.1
N$83: Q29.1 R97.1
N$84: Q28.3 R94.2 R97.2
N$85: C33.1 D4.C R94.1
N$86: Q30.1 R98.1
N$87: Q31.1 R101.1
N$88: Q32.1 R102.1
N$89: Q31.3 R100.2 R102.2
N$90: C34.1 D5.C R100.1
N$91: Q33.1 R103.1
N$92: Q34.1 R106.1
N$93: Q35.1 R107.1
N$94: Q34.3 R105.2 R107.2
N$95: C35.1 D6.C R105.1
N$96: Q36.1 R108.1
N$97: R117.2 U9.12
N$98: JP4.1 U9.19
N$99: C36.2 U9.20
N$100: U9.7 X4.3
N$101: U9.8 X4.1
N$103: Q37.1 R122.1
N$104: Q38.1 R124.1
N$105: Q37.3 R121.2 R124.2
N$106: C39.1 D10.C R121.1
N$107: Q39.1 R125.1
N$108: Q40.1 R128.1
N$109: Q41.1 R129.1
N$110: Q40.3 R127.2 R129.2
N$111: C40.1 D11.C R127.1
N$112: Q42.1 R130.1
N$113: Q43.1 R133.1
N$114: Q44.1 R134.1
N$115: Q43.3 R132.2 R134.2
N$116: C41.1 D12.C R132.1
N$117: Q45.1 R135.1
N$118: R144.2 U11.12
N$119: JP5.1 U11.19
N$120: C42.2 U11.20
N$121: U11.7 X5.3
N$122: U11.8 X5.1
NEUTRAL_SENSE: R6.2 R29.2 R30.2 U8.10
NEUTRAL_SENSE2: R96.2 R109.2 R110.2 U9.10
NEUTRAL_SENSE3: R69.2 R82.2 R83.2 U10.10
NEUTRAL_SENSE4: R123.2 R136.2 R137.2 U11.10
NT-RX: J2.2 U7.52
NT-TX: J2.3 U7.51
PWM: J7.23 R37.1 R38.1
PWM2: J7.24 R117.1 R118.1
PWM3: J7.25 R90.1 R91.1
PWM4: J7.26 R144.1 R145.1
PWR_EN: J7.18 R13.2 U14.3 U14.6
RESET: J7.17 U7.7
RST: J7.11 U2.13
RST1: C68.1 R3.1 U2.12 U8.29
RST2: C65.1 R93.1 U2.14 U9.29
RST3: C71.1 R66.1 U2.15 U10.29
RST4: C74.1 R120.1 U2.11 U11.29
RX: J7.22 U7.43
SCK: J7.14 U2.3
SCK1: U2.1 U8.17
SCK2: U2.5 U9.17
SCK3: U2.2 U10.17
SCK4: U2.4 U11.17
SCL: U7.29
SCL2: U7.58
SDA: U7.30
SDA2: U7.59
SEL0: J7.9 U2.10 U3.10
SEL1: J7.10 U2.9 U3.9
SWCLK: J7.16 U7.49
SWDIO: J7.15 U7.46
TX: J7.21 U7.42
V2FUSED: C17.1 F2.2 U1.2
V_LATCH: R11.1 R13.1 R14.1 R15.2 R39.2 U14.1 U14.5
VDD: C6.1 C8.2 C9.1 C10.1 C12.1 C13.2 C15.2 C16.2 C19.2 C20.2 C21.2 C22.2 C23.2 C24.2 C25.2 C38.1 C48.1 C49.1 C57.1 C58.1 C59.1 C60.1 C61.1 D1.A D2.A D3.A D4.A D5.A D6.A D7.A D8.A D9.A D10.A D11.A D12.A F1.1 F2.1 J1.+ Q4.2 Q6.2 Q8.2 Q20.2 Q23.2 Q26.2 Q29.2 Q32.2 Q35.2 Q38.2 Q41.2 Q44.2 R39.1 R40.1 U4.4 U4.11 U5.4 U5.11 U6.4 U6.11
VFUSED: C2.1 F1.2 U12.2

## Tracks (layer width: path | path; a pad name or v marks a point on that pad's centre or on a via)
+3V3  (via drill 0.35)
  Top 0.152: U7.1 51.17,21.2 | 51.17,21.2 50.67,21.7 C46.2 51.4,23.08 U7.64 | 51.17,21.2 51.18,21.21 52.2,21.21 52.7,20.7 53.34,20.7 | 54.15,10.29 U7.19 | U7.32 61.19,11.18 C50.2 62.74,10.22 v62.74,9.65 | v50.01,15.15 50.84,15.15 50.93,15.24 51.13,15.24 U7.13 52.2,15.15 53.34,16.29 53.34,20.7 | 53.34,20.7 58.61,20.7 59.05,21.15 v61.34,21.15 U7.48 | 54.15,10.29 51.94,10.29 50.1,12.13 50.1,13.06 v49.92,13.24 | 24.61,1.88 25.72,0.76 50.42,0.76 51.44,1.78 51.44,3.9 53.95,6.42 53.95,8.03 54.15,8.23 54.15,10.29
  Top 0.203: 24.61,1.88 23.77,1.88 23.67,1.98
  Top 0.254: 23.67,1.98 23.61,2.05 | R16.2 14.48,6.48 v13.84,5.84 | J7.6 J7.5 23.96,5.02 23.8,4.86 | J7.4 J7.3
  Top 0.508: v12.95,4.45 13.08,4.45 v13.46,4.83 v13.46,4.06 13.46,3.17 15.19,1.45 23.14,1.45 23.67,1.98 23.8,2.11 23.8,4.86 J7.4
  Bottom 0.152: v61.34,21.15 61.34,19.53 62.22,18.65 62.22,17.79 62.1,17.67 62.1,14.61 62.48,14.22 62.48,10.29 62.74,10.03 v62.74,9.65 | v49.92,13.24 50.01,13.33 v50.01,15.15
  Bottom 0.254: v13.84,5.84 10.92,5.84 L1.P$2
  Bottom 0.508: v12.95,4.45 12.25,4.45 C63.1 C56.1 10.16,4.76 L1.P$2
+5V  (via drill 0.35)
  Top 0.152: v30.99,39.12 30.86,39.24 30.86,39.69 | U9.4 25.64,66.65 25.15,66.65 25.15,66.6 24.82,66.27 24.82,65.52 25.24,65.09 U9.6 24.5,65.09 C62.1 | 31.83,47.68 R3.2 | C37.2 36.36,63.18 36.8,63.63 | v36.8,63.09 36.8,63.63 | 36.8,63.63 C66.2 | v31.98,72.24 R93.2 | 48.51,33.33 v48.69,33.3
  Top 0.254: 27.03,39.69 U8.6 24.56,39.69 C67.1 | 27.03,39.69 30.86,39.69 30.99,39.69 | 30.99,39.69 32.19,39.69 33.02,38.86 34.23,38.86 U8.18 34.89,38.89 35.02,38.76 35.22,38.76 C7.2 36.07,37.91 C69.2 | U9.6 32.19,65.09 33.02,64.26 34.23,64.26 U9.18 34.83,64.29 C37.2 | 43.88,62.61 43.88,62.29 44.74,61.44 U10.18 45.78,61.47 46.74,61.47 | 43.88,62.61 C32.2 44.45,62.74 v44.58,62.61 | 46.74,61.47 46.99,61.47 47.82,60.64 U10.6 54.35,60.66 | U11.6 47.82,34.98 | 47.82,34.98 46.99,35.81 45.78,35.81 U11.18 45.65,35.87 44.96,35.87 44.85,35.99 v44.74,35.99 | 43.88,62.61 43.09,61.82 42.29,61.82 42.19,61.72 41.66,61.72 41.55,61.62 C72.2 | U3.16 v38.1,15.87 38.99,16.76 38.99,21.21 38.49,21.71 U2.16 | J2.4 66.19,22.33 v66.29,22.23 | R120.2 48.13,27.43 v47.91,27.65 | U8.4 26.57,41.29 27.03,40.84 27.03,39.69 | R66.2 48.21,52.3 v48.21,51.76 | C70.1 55.38,59.04 U10.4 52.83,59.03 52.63,58.83 47.85,58.83 46.74,59.94 46.74,61.47 | C73.1 54.48,33.53 U11.4 54.27,33.33 48.51,33.33 47.85,33.98 47.85,34.56 47.82,34.59 47.82,34.98 | C62.1 24.23,64.46 22.74,62.97 v22.45,62.97 | v32.64,47.75 R3.2 | v30.99,39.12 30.99,39.69 | R10.2 26.54,7.87 26.16,7.87 v25.4,7.11 | 22.23,4.57 22.23,4.95 | 22.23,4.95 22.23,4.97 J7.2 | J7.1 22.23,4.95
  Top 0.508: v22.1,3.56 22.1,4.45 22.23,4.57
  Bottom 0.152: C75.2 44.73,35.99 v44.74,35.99
  Bottom 0.254: U6.16 U6.17 42.54,18.28 44.07,19.81 | U4.22 67.64,17.91 67.09,18.45 67.09,18.63 v67.06,18.67 | U4.24 68.94,18.92 | 44.07,19.81 45.09,19.81 45.79,19.11 45.79,18.8 | 45.79,18.8 U6.22 | U5.16 U5.17 53.46,17.91 v54.03,18.48 55.88,18.48 | 57.53,19.43 56.46,19.43 56.1,19.08 56.1,18.7 55.88,18.48 | U5.24 58.01,18.95 57.53,19.43 | 57.53,19.43 58.93,19.43 59.31,19.05 U5.26 | 45.97,21.72 44.07,19.81 | 47.12,21.72 48.39,21.72 48.39,21.71 U6.26 | 47.12,21.72 47.09,21.69 U6.24 | U5.22 56.71,17.96 56.2,18.48 56.07,18.48 | 55.88,18.48 56.07,18.48 | U4.16 U4.17 64.39,18.28 v64.58,18.48 64.77,18.67 v67.06,18.67 | v67.06,18.67 67.31,18.92 68.94,18.92 | 68.94,18.92 69.47,18.92 69.5,18.89 69.79,18.89 70.23,18.45 U4.26 | C43.2 44.97,35.99 v44.74,35.99 44.74,34.64 44.73,34.62 | 47.12,21.72 45.97,21.72 | 45.97,21.72 46.38,22.12 v46.38,22.27 | 45.79,18.8 45.74,18.75 v45.74,18.33 | v55.81,18.73 56.07,18.48 | L2.P$2 22.73,4.32 24.77,4.32 25.4,4.95 v25.4,7.11
  Bottom 0.508: 20.27,5.03 19.61,4.37 | 20.29,5.05 20.27,5.03 | 20.27,5.03 20.27,4.22 | C64.1 21.34,2.79 v22.1,3.56
  Bottom 0.635: C47.1 17.92,4.37 19.61,4.37 19.61,3.93 C64.1
  other vias: 43.58,19.22
  pour Route2 (isolate 0.254): -0.25,88.9 80.42,88.9 80.42,-0.25 -0.25,-0.25
A0  (via drill 0.35)
  Top 0.152: U7.27 58.28,11.85 58.28,12.86 58.98,13.56 60.4,13.56 60.73,13.23 60.73,13.06 61.72,12.06 67.69,12.06 v71.12,15.49
  Bottom 0.152: v71.12,15.49 70.89,15.73 U4.27
A1  (via drill 0.35)
  Top 0.152: v59.96,18.19 55.65,13.87 U7.22
  Bottom 0.152: U5.27 v59.96,18.19
A2  (via drill 0.35)
  Top 0.152: v49.02,21.08 49.02,23.62 50.09,24.69 53.49,24.69 54.15,24.03 U7.62
  Bottom 0.152: U6.27 49.04,21.06 v49.02,21.08
A_SENSE  (via drill 0.35)
  Top 0.254: R30.1 R33.2 29.6,29.34 32.02,29.34 R34.1 32.78,31.2 v32.82,31.24 | U8.24 34.22,43.74 34.01,43.53 32.95,43.53 v32.75,43.33
  Bottom 0.254: v32.82,31.24 32.82,38.15 32.39,38.57 32.39,42.87 32.75,43.23 v32.75,43.33
A_SENSE2  (via drill 0.35)
  Top 0.254: R110.1 R113.2 29.6,54.74 32.02,54.74 R114.1 32.78,56.6 v32.82,56.64 | U9.24 34.22,69.14 34.05,68.96 v33.34,68.96
  Bottom 0.254: v32.82,56.64 32.82,63.55 32.26,64.11 32.11,64.11 31.73,64.49 31.73,65.28 31.98,65.53 31.98,66.04 31.7,66.31 31.7,68.28 32.39,68.96 v33.34,68.96
A_SENSE3  (via drill 0.35)
  Top 0.254: R83.1 R86.2 50.41,70.99 47.99,70.99 R87.1 47.23,69.13 v47.19,69.09 | v46.57,56.51 45.87,56.51 U10.24
  Bottom 0.254: v46.57,56.51 46.65,56.69 46.65,56.71 47.14,57.2 47.14,57.37 47.6,57.83 47.6,58.73 47.19,59.14 v47.19,69.09
A_SENSE4  (via drill 0.35)
  Top 0.254: R137.1 R140.2 50.41,45.34 47.99,45.34 R141.1 47.23,43.47 v47.19,43.43 | v46.74,30.94 45.79,30.94 U11.24
  Bottom 0.254: v47.19,43.43 47.19,36.68 47.93,35.94 47.93,33.1 48,33.03 48,31.65 47.3,30.94 v46.74,30.94
AHIN
  Top 0.152: 29.07,48.01 28.99,48.01
  Top 0.254: U8.27 31.11,45.24 31.11,47.11 30.84,47.38 30.84,48.33 30.67,48.49 29.48,48.49 28.99,48.01 25.45,48.01 23.11,45.67 21.67,45.67 20.93,44.94 20.93,43.18 20.43,42.67 R5.2
AHIN2
  Top 0.254: R95.2 21.08,68.07 21.59,68.58 21.59,70.1 22.35,70.87 24,70.87 27.56,74.42 30.73,74.42 30.81,74.35 30.82,74.35 31.17,74 U9.27
AHIN3
  Top 0.254: R68.2 58.93,57.66 58.42,57.15 58.42,55.63 57.66,54.86 56.01,54.86 52.95,51.8 52.86,51.71 52.83,51.69 49.24,51.69 48.97,51.96 48.97,52.88 48.39,53.45 48.39,54.18 48.84,54.62 U10.27
AHIN4
  Top 0.254: U11.27 48.84,28.86 48.69,28.72 48.69,26.63 49.08,26.24 53.67,26.24 56.64,29.21 58.22,29.21 58.58,29.57 58.58,31.24 59.34,32 R122.2
ALIN
  Top 0.254: U8.30 28.77,46.67 28.32,47.12 25.71,47.12 22.73,44.13 22.73,42.44 21.57,41.29 16.27,41.29 15.19,42.37 15.19,43.09 R1.1 R18.2
ALIN2
  Top 0.152: 23.24,69.34 23.16,69.26 23.16,67.78 23.03,67.65 22.17,67.65 21.84,67.97 21.48,67.97 20.82,67.31 19,67.31
  Top 0.254: U9.30 28.77,72.07 28.32,72.52 26.42,72.52 23.24,69.34 | 19,67.31 16.37,67.31 R92.1 R98.2
ALIN3
  Top 0.254: U10.30 51.24,53.66 51.69,53.21 53.59,53.21 56.77,56.39 56.77,57.94 57.25,58.42 63.64,58.42 R65.1 R71.2
ALIN4
  Top 0.254: U11.30 51.24,28.01 51.69,27.56 53.59,27.56 56.77,30.73 56.77,32.29 57.6,33.12 64.21,33.12 64.67,32.66 64.67,31.74 R119.1 R125.2
AOUT  (via drill 0.35)
  Top 0.152: 34.29,45.52 34.29,44.32 34.17,44.2 33.53,44.2 33.22,43.89 32.51,43.89 31.38,42.75 v31.29,42.75
  Top 0.254: C1.2 12.95,48.51 v13.59,49.15 13.61,49.17 17.17,49.17 17.78,49.78 32,49.78 34.29,47.5 34.29,45.52 | R33.1 30.61,30.11 v30.61,30.99
  Bottom 0.152: v31.29,42.75 31.2,42.66 31.2,40.49
  Bottom 0.203: 31.2,40.49 31.2,40.15 31.67,39.67 31.67,38.59 31.42,38.34 31.42,37.79 31.88,37.34
  Bottom 0.254: v30.61,30.99 30.61,33.09 31.88,34.36 31.88,37.34 | v13.59,49.15 13.59,45.13 Q5.2
  other vias: 7.87,43.94 6.86,43.94 5.84,43.94 1.52,45.72 1.52,44.7 1.52,43.69 1.52,42.67 3.56,42.67 3.56,43.69 3.56,44.7 3.56,45.72 5.84,45.72 6.86,45.72 7.87,45.72
  pour Bottom (no thermals): 16.51,43.18 17.27,43.94 19.56,43.94 21.84,46.23 21.84,49.02 11.18,49.02 10.41,48.26 15.49,43.18
  pour Bottom (no thermals): 11.43,45.97 4.32,45.97 3.81,46.48 0.76,46.48 0.76,42.16 4.57,42.16 5.33,43.69 8.38,43.69 10.41,41.91 10.72,41.91 11.43,42.42 11.43,43.94 11.68,44.2 11.68,45.72
  pour Top (no thermals): 1.02,46.23 4.06,46.23 4.32,45.97 8.38,45.97 8.38,43.69 5.08,43.69 3.81,42.42 1.02,42.42
AOUT2  (via drill 0.35)
  Top 0.254: C33.2 12.95,74.12 v12.19,74.88 12.65,74.42 15.94,74.42 16.09,74.57 24.33,74.57 24.59,74.83 32.51,74.83 34.29,73.05 v34.29,71.32 | R113.1 30.61,55.51 v30.61,56.39
  Bottom 0.152: Q30.2 12.19,71.92 12.19,74.17
  Bottom 0.254: 12.19,74.17 v12.19,74.88 | v30.61,56.39 30.61,58.49 31.88,59.76 31.88,62.77 30.76,63.88 30.76,68.73 32.32,70.29 33.26,70.29 v34.29,71.32
  other vias: 7.87,69.34 6.86,69.34 5.84,69.34 1.52,71.12 1.52,70.1 1.52,69.09 1.52,68.07 3.56,68.07 3.56,69.09 3.56,70.1 3.56,71.12 5.84,71.12 6.86,71.12 7.87,71.12
  pour Bottom (no thermals): 16.51,68.58 17.27,69.34 19.56,69.34 21.84,71.63 21.84,74.42 11.18,74.42 10.41,73.66 15.49,68.58
  pour Bottom (no thermals): 11.43,71.37 4.32,71.37 3.81,71.88 0.76,71.88 0.76,67.56 4.57,67.56 5.33,69.09 8.38,69.09 10.41,67.31 10.72,67.31 11.43,67.82 11.43,69.34 11.68,69.6 11.68,71.12
  pour Top (no thermals): 1.02,71.63 4.06,71.63 4.32,71.37 8.38,71.37 8.38,69.09 5.08,69.09 3.81,67.82 1.02,67.82
AOUT3  (via drill 0.35)
  Top 0.254: R86.1 49.4,70.22 v49.4,69.34 | C28.2 67.06,51.1 v66.8,50.85 63.96,50.85 63.65,51.16 47.85,51.16 47.12,51.89 v47.12,53.72
  Bottom 0.152: Q21.2 66.27,55.35 67.82,53.81 67.82,51.56
  Bottom 0.254: v49.4,69.34 49.4,67.24 48.13,65.97 48.13,62.76 48.52,62.37 48.74,62.15 48.74,61.34 48.74,57.25 48.51,57.03 48.51,56.26 47.12,54.86 v47.12,53.72 | v66.8,50.85 66.8,54.82 66.27,55.35
  other vias: 72.14,56.39 73.15,56.39 74.17,56.39 78.49,54.61 78.49,55.63 78.49,56.64 78.49,57.66 76.45,57.66 76.45,56.64 76.45,55.63 76.45,54.61 74.17,54.61 73.15,54.61 72.14,54.61
  pour Bottom (no thermals): 63.5,57.15 62.74,56.39 60.45,56.39 58.17,54.1 58.17,51.31 68.83,51.31 69.6,52.07 64.52,57.15
  pour Bottom (no thermals): 68.58,54.36 75.69,54.36 76.2,53.85 79.25,53.85 79.25,58.17 75.44,58.17 74.68,56.64 71.63,56.64 69.6,58.42 69.29,58.42 68.58,57.91 68.58,56.39 68.33,56.13 68.33,54.61
  pour Top (no thermals): 78.99,54.1 75.95,54.1 75.69,54.36 71.63,54.36 71.63,56.64 74.93,56.64 76.2,57.91 78.99,57.91
AOUT4  (via drill 0.35)
  Top 0.254: C39.2 67.06,25.96 v66.52,25.43 57.88,25.43 57.55,25.76 47.81,25.76 47.17,26.4 47.17,26.94 47.12,26.99 v47.12,28.07 | R140.1 49.4,44.56 v49.4,43.69
  Bottom 0.254: v49.4,43.69 49.4,41.58 48.13,40.31 48.13,37.1 49.37,35.87 49.37,31.46 47.12,29.21 v47.12,28.07 | v66.52,25.43 66.52,29.45 Q39.2
  other vias: 72.14,30.73 73.15,30.73 74.17,30.73 78.49,28.96 78.49,29.97 78.49,30.99 78.49,32 76.45,32 76.45,30.99 76.45,29.97 76.45,28.96 74.17,28.96 73.15,28.96 72.14,28.96
  pour Bottom (no thermals): 63.5,31.5 62.74,30.73 60.45,30.73 58.17,28.45 58.17,25.65 68.83,25.65 69.6,26.42 64.52,31.5
  pour Bottom (no thermals): 68.58,28.7 75.69,28.7 76.2,28.19 79.25,28.19 79.25,32.51 75.44,32.51 74.68,30.99 71.63,30.99 69.6,32.77 69.29,32.77 68.58,32.26 68.58,30.73 68.33,30.48 68.33,28.96
  pour Top (no thermals): 78.99,28.45 75.95,28.45 75.69,28.7 71.63,28.7 71.63,30.99 74.93,30.99 76.2,32.26 78.99,32.26
B0  (via drill 0.35)
  Top 0.152: U7.26 57.65,12.66 58.85,13.87 60.53,13.87 61.03,13.36 61.03,13.19 61.75,12.47 67.33,12.47 69.54,14.68 v69.54,18.29
  Bottom 0.152: v69.54,18.29 69.54,17.01 U4.25
B1  (via drill 0.35)
  Top 0.152: U7.17 53.15,12.76 v58.67,18.29
  Bottom 0.152: U5.25 58.66,18.28 v58.67,18.29
B2  (via drill 0.35)
  Top 0.152: v47.75,21.08 47.24,21.08 46.35,20.19 46.35,17.53 48.6,15.28 48.6,14.88 49.33,14.15 U7.15
  Bottom 0.152: U6.25 v47.74,21.07 v47.75,21.08
B_SENSE  (via drill 0.35)
  Top 0.254: R29.1 R35.1 29.6,27.56 32.02,27.56 R32.2 33.58,29.12 v33.58,29.26 | U8.23 v33.53,42.89
  Bottom 0.254: v33.58,29.26 33.58,32.16 33.27,32.46 33.27,38.26 32.79,38.74 32.79,42.29 33.02,42.51 33.02,42.67 33.31,42.67 v33.53,42.89
B_SENSE2  (via drill 0.35)
  Top 0.254: R109.1 R115.1 29.6,52.96 32.02,52.96 R112.2 33.58,54.52 v33.58,54.66 | v32.77,68.33 32.8,68.29 U9.23
  Bottom 0.254: v33.58,54.66 33.58,57.56 33.27,57.86 33.27,63.66 32.42,64.51 32.36,64.51 32.16,64.72 32.16,65.14 32.38,65.37 32.38,66.21 32.16,66.43 32.16,67.72 v32.77,68.33
B_SENSE3  (via drill 0.35)
  Top 0.254: R82.1 R88.1 50.41,72.77 47.99,72.77 R85.2 46.43,71.21 v46.43,71.07 | v46.53,57.45 45.76,57.45 U10.23
  Bottom 0.254: v46.43,71.07 46.43,68.17 46.74,67.87 46.74,59.02 47.19,58.56 47.19,58 46.73,57.54 v46.53,57.45
B_SENSE4  (via drill 0.35)
  Top 0.254: R136.1 R142.1 50.41,47.12 47.99,47.12 R139.2 46.43,45.55 v46.43,45.41 | v47.24,31.75 47.21,31.78 U11.23
  Bottom 0.254: v46.43,45.41 46.43,42.52 46.74,42.22 46.74,36.47 47.52,35.69 47.52,32.94 47.6,32.86 47.6,32.1 v47.24,31.75
BATT_SCL  (via drill 0.35)
  Top 0.152: v37.34,8 38.61,8 40.25,9.65 40.25,15.19 40.31,15.25 40.31,21.77 40.19,21.89 40.19,26.07 40.06,26.21 40.06,57.23 38.47,58.81 38.47,63.71 38.51,63.75 | v61.21,79.5 61.21,79.25 59.87,77.9 45.64,77.9 43.1,75.36 43.1,67.06 41.63,65.58 40.34,65.58 38.51,63.75 | 38.51,63.75 | v32.17,6.71 31.46,6 J7.20
  Bottom 0.152: v61.21,79.5 61.21,83.31 59.44,85.09 55.5,85.09 SCL.TP | v37.34,8 33.46,8 v32.17,6.71
BATT_SDA  (via drill 0.35)
  Top 0.152: v38.99,9.27 39.95,10.23 39.95,15.31 40.01,15.37 40.01,21.63 39.89,21.75 39.89,25.95 39.75,26.08 39.75,57.1 38.16,58.69 38.16,63.84 38.44,64.12 | v60.36,79.25 59.34,78.23 45.41,78.23 42.77,75.59 42.77,67.26 41.4,65.89 40.21,65.89 38.44,64.12 | 38.44,64.12 38.49,64.17 | 38.44,64.12 | v30.35,2.99 30.96,3.6 J7.19
  Bottom 0.152: v38.99,9.27 38.99,8 34.8,3.81 31.18,3.81 v30.35,2.99 | v60.36,79.25 60.36,83.66 59.23,84.78 52.12,84.78 SDA.TP
BHIN
  Top 0.254: 19.83,34.95 R21.2 20.38,34.8 20.9,34.27 21.93,34.27 22.47,34.81 22.47,37.47 22.11,37.83 22.11,41.25 23.14,42.28 23.14,43.97 25.78,46.61 27.43,46.61 27.94,46.1 27.94,45.22 U8.31
BHIN2  (via drill 0.35)
  Top 0.152: 23.65,69.17 23.46,68.99 23.46,67.65 23.15,67.34 22.04,67.34 22.02,67.36 v21.66,67.36
  Top 0.254: R101.2 19.83,60.35 21.08,60.35 21.51,60.78 21.51,61.21 21.23,61.49 21.23,64.95 21.25,64.96 21.25,65.83 v21.45,66.03 | U9.31 27.94,70.62 27.94,71.5 27.43,72.01 26.48,72.01 23.65,69.17
  Bottom 0.152: v21.66,67.36 21.45,67.15 v21.45,66.03
BHIN3
  Top 0.254: R74.2 60.18,65.38 58.93,65.38 58.5,64.94 58.5,63.33 57.78,62.61 57.12,62.61 56.8,62.29 56.8,58.55 56.36,58.11 56.36,56.56 53.53,53.72 52.58,53.72 52.07,54.23 52.07,55.11 U10.31
BHIN4
  Top 0.254: R128.2 60.18,39.72 58.93,39.72 58.5,39.29 58.5,37.67 57.78,36.96 57.12,36.96 56.8,36.64 56.8,32.89 56.36,32.46 56.36,30.9 53.53,28.07 52.58,28.07 52.07,28.57 52.07,29.46 U11.31
BLIN  (via drill 0.35)
  Top 0.254: R23.2 R19.1 18.12,32.28 21.49,32.28 22.39,31.39 28.91,31.39 30.13,32.61 30.13,33.47 v30.44,33.78 | 30.37,44.22 U8.28 30.37,43.67 v30.69,43.36
  Bottom 0.254: v30.44,33.78 30.71,33.78 31.47,34.54 31.47,37.2 30.24,38.43 30.24,39.62 30.69,40.07 30.69,42.5 | v30.69,43.36 30.69,43.01 | 30.69,43.01 | 30.69,43.01 30.69,42.5 | 30.69,42.5
BLIN2  (via drill 0.35)
  Top 0.254: R103.2 R99.1 18.17,57.63 21.54,57.63 21.57,57.61 21.79,57.61 22.12,57.28 23.62,57.28 24.11,56.79 28.91,56.79 30.13,58.01 30.13,58.87 v30.44,59.18 | v30.48,69.47 30.48,70.48 U9.28
  Bottom 0.254: v30.44,59.18 30.71,59.18 31.47,59.94 31.47,62.6 30.36,63.72 30.36,69.34 v30.48,69.47
BLIN3  (via drill 0.35)
  Top 0.254: R76.2 R72.1 62.24,67.69 58.65,67.69 57.73,68.61 56.96,68.61 56.63,68.94 51.1,68.94 49.88,67.72 49.88,66.86 v49.57,66.55 | v49.53,56.26 49.53,55.25 U10.28
  Bottom 0.254: v49.57,66.55 49.3,66.55 48.54,65.79 48.54,63.01 49.15,62.4 49.15,56.65 v49.53,56.26
BLIN4  (via drill 0.35)
  Top 0.254: R130.2 R126.1 62.24,42.04 58.65,42.04 57.73,42.96 56.23,42.96 55.9,43.29 51.1,43.29 49.88,42.07 49.88,41.2 v49.57,40.89 | v49.53,30.61 49.53,29.6 U11.28
  Bottom 0.254: v49.57,40.89 49.3,40.89 48.54,40.13 48.54,37.35 49.77,36.12 49.77,30.85 v49.53,30.61
BOOT0  (via drill 0.35)
  Top 0.152: U7.60 55.15,21.56 v55.17,21.54
  Bottom 0.152: v55.17,21.54 55.38,21.32 R12.2
BOUT  (via drill 0.35)
  Top 0.254: C3.2 v13.46,39.37 | R32.1 33.67,27.46 v33.67,27.02
  Bottom 0.254: v13.46,39.37 13.46,37.13 Q7.2 | v33.67,27.02 33.67,26.71 32.31,25.35 30.73,25.35 30.02,24.64 23.06,24.64 22.55,25.15 22.55,32.13 22.53,32.16 22.53,32.37 21.26,33.64 21.26,37.43 Q6.3
  other vias: 7.87,35.81 6.86,35.81 5.84,35.81 1.52,37.59 1.52,36.58 1.52,35.56 1.52,34.54 3.56,34.54 3.56,35.56 3.56,36.58 3.56,37.59 5.84,37.59 6.86,37.59 7.87,37.59
  pour Bottom (no thermals): 16.51,34.8 17.53,36.07 20.07,36.07 21.84,37.85 21.84,40.13 11.18,40.13 10.41,39.88 15.49,34.8
  pour Bottom (no thermals): 11.43,37.85 4.32,37.85 3.81,38.35 0.76,38.35 0.76,34.04 4.57,34.04 5.33,35.56 8.38,35.56 10.41,33.78 11.43,34.29 11.43,35.81 11.68,36.07 11.68,37.59
  pour Top (no thermals): 1.02,38.1 4.06,38.1 4.32,37.85 8.38,37.85 8.38,35.56 5.08,35.56 3.81,34.29 1.02,34.29
BOUT2  (via drill 0.35)
  Top 0.254: C34.2 v13.01,64.77 | v22.48,50.55 22.78,50.24 v33.07,50.24 | R112.1 v34.53,53.19
  Bottom 0.254: v13.01,64.77 13.46,62.53 Q33.2 | Q32.3 21.69,62.4 21.69,60.25 22.55,59.38 22.55,50.8 22.48,50.72 v22.48,50.55 | v33.07,50.24 33.43,50.6 33.43,51.87 34.53,52.97 v34.53,53.19
  other vias: 7.87,61.21 6.86,61.21 5.84,61.21 1.52,62.99 1.52,61.98 1.52,60.96 1.52,59.94 3.56,59.94 3.56,60.96 3.56,61.98 3.56,62.99 5.84,62.99 6.86,62.99 7.87,62.99
  pour Bottom (no thermals): 16.51,60.2 17.53,61.47 20.07,61.47 21.84,63.25 21.84,65.53 11.18,65.53 10.41,65.28 15.49,60.2
  pour Bottom (no thermals): 11.43,63.25 4.32,63.25 3.81,63.75 0.76,63.75 0.76,59.44 4.57,59.44 5.33,60.96 8.38,60.96 10.41,59.18 11.43,59.69 11.43,61.21 11.68,61.47 11.68,62.99
  pour Top (no thermals): 1.02,63.5 4.06,63.5 4.32,63.25 8.38,63.25 8.38,60.96 5.08,60.96 3.81,59.69 1.02,59.69
BOUT3  (via drill 0.35)
  Top 0.254: C29.2 v66.55,60.96 | v45.62,72.9 45.48,72.76 R85.1 | v47.75,75.69 57.02,75.69 v57.53,75.18
  Bottom 0.254: v66.55,60.96 66.55,63.2 Q24.2 | Q23.3 58.32,63.33 58.32,65.48 57.45,66.34 57.45,75.18 v57.53,75.18 | v45.62,72.9 46.58,73.86 46.58,75.13 47.14,75.69 v47.75,75.69
  other vias: 72.14,64.52 73.15,64.52 74.17,64.52 78.49,62.74 78.49,63.75 78.49,64.77 78.49,65.79 76.45,65.79 76.45,64.77 76.45,63.75 76.45,62.74 74.17,62.74 73.15,62.74 72.14,62.74
  pour Bottom (no thermals): 63.5,65.53 62.48,64.26 59.94,64.26 58.17,62.48 58.17,60.2 68.83,60.2 69.6,60.45 64.52,65.53
  pour Bottom (no thermals): 68.58,62.48 75.69,62.48 76.2,61.98 79.25,61.98 79.25,66.29 75.44,66.29 74.68,64.77 71.63,64.77 69.6,66.55 68.58,66.04 68.58,64.52 68.33,64.26 68.33,62.74
  pour Top (no thermals): 78.99,62.23 75.95,62.23 75.69,62.48 71.63,62.48 71.63,64.77 74.93,64.77 76.2,66.04 78.99,66.04
BOUT4  (via drill 0.35)
  Top 0.254: C40.2 v66.55,35.31 | v45.62,47.24 45.48,47.1 R139.1 | v46.94,49.84 57.23,49.84 v57.53,49.53
  Bottom 0.254: v66.55,35.31 66.55,37.55 Q42.2 | Q41.3 58.32,37.68 58.32,39.83 57.84,40.31 57.84,41.13 57.72,41.25 57.72,42.23 57.45,42.49 57.45,49.45 v57.53,49.53 | v46.94,49.84 46.58,49.48 46.58,48.21 v45.62,47.24
  other vias: 72.14,38.86 73.15,38.86 74.17,38.86 78.49,37.08 78.49,38.1 78.49,39.12 78.49,40.13 76.45,40.13 76.45,39.12 76.45,38.1 76.45,37.08 74.17,37.08 73.15,37.08 72.14,37.08
  pour Bottom (no thermals): 63.5,39.88 62.48,38.61 59.94,38.61 58.17,36.83 58.17,34.54 68.83,34.54 69.6,34.8 64.52,39.88
  pour Bottom (no thermals): 68.58,36.83 75.69,36.83 76.2,36.32 79.25,36.32 79.25,40.64 75.44,40.64 74.68,39.12 71.63,39.12 69.6,40.89 68.58,40.39 68.58,38.86 68.33,38.61 68.33,37.08
  pour Top (no thermals): 78.99,36.58 75.95,36.58 75.69,36.83 71.63,36.83 71.63,39.12 74.93,39.12 76.2,40.39 78.99,40.39
C0  (via drill 0.35)
  Top 0.152: U7.23 56.28,11.85 56.28,12.71 57.74,14.17 60.66,14.17 61.34,13.49 61.34,13.41 61.98,12.78 67,12.78 68.33,14.1 68.33,18.15 v68.26,18.22
  Bottom 0.152: v68.26,18.22 68.26,17 U4.23
C1  (via drill 0.35)
  Top 0.152: v56.71,18.82 56.71,17.62 52.74,13.65 U7.16
  Bottom 0.152: U5.23 57.36,18.25 57.32,18.29 57.32,18.41 56.91,18.82 v56.71,18.82
C2  (via drill 0.35)
  Top 0.152: v46.38,21.08 46.38,21.48 49.89,24.99 53.61,24.99 54.65,23.96 U7.61
  Bottom 0.152: U6.23 46.44,21.02 v46.38,21.08
C_SENSE  (via drill 0.35)
  Top 0.254: R6.1 R36.1 29.6,25.27 32.02,25.27 R31.2 32.82,26.07 v32.82,27.03 | U8.22 33.46,42.09 v33.4,42.04
  Bottom 0.254: v32.82,27.03 34.19,28.39 34.19,29.51 34.09,29.61 34.09,32.51 33.73,32.87 33.73,38.46 33.4,38.79 v33.4,42.04
C_SENSE2  (via drill 0.35)
  Top 0.254: R96.1 R116.1 29.6,50.67 32.02,50.67 R111.2 32.78,51.73 v32.82,51.77 | v33.02,67.47 33.05,67.49 U9.22
  Bottom 0.254: v33.02,67.47 32.72,67.16 32.72,66.45 32.79,66.37 32.79,65.2 32.72,65.12 32.72,64.87 33.73,63.86 33.73,58.27 34.09,57.91 34.09,55.01 34.19,54.91 34.19,53.79 32.82,52.43 v32.82,51.77
C_SENSE3  (via drill 0.35)
  Top 0.254: R69.1 R89.1 50.41,75.06 47.99,75.06 R84.2 47.19,74.26 v47.19,73.3 | v46.58,58.31 46.51,58.24 U10.22
  Bottom 0.254: v47.19,73.3 45.82,71.94 45.82,70.82 45.92,70.72 45.92,67.82 46.28,67.46 46.28,58.69 46.64,58.33 v46.58,58.31
C_SENSE4  (via drill 0.35)
  Top 0.254: R123.1 R143.1 50.41,49.4 47.99,49.4 R138.2 47.19,48.6 v47.19,47.65 | v46.99,32.61 46.96,32.58 U11.22
  Bottom 0.254: v47.19,47.65 45.82,46.28 45.82,45.16 45.92,45.06 45.92,42.16 46.28,41.81 46.28,36.22 47.11,35.38 47.11,33.15 46.99,33.02 v46.99,32.61
CHIN  (via drill 0.35)
  Top 0.254: R26.2 21.03,26.16 v21.29,26.42 | U8.1 24.7,43.69 23.54,42.54 23.54,42.11 22.52,41.08 22.52,37.99 22.88,37.63 22.88,34.64 22.1,33.86 20.56,33.86 v19.94,33.25